# EAGLE board BulkBoard3 (EAGLE 9.0.0), part 1 of 3
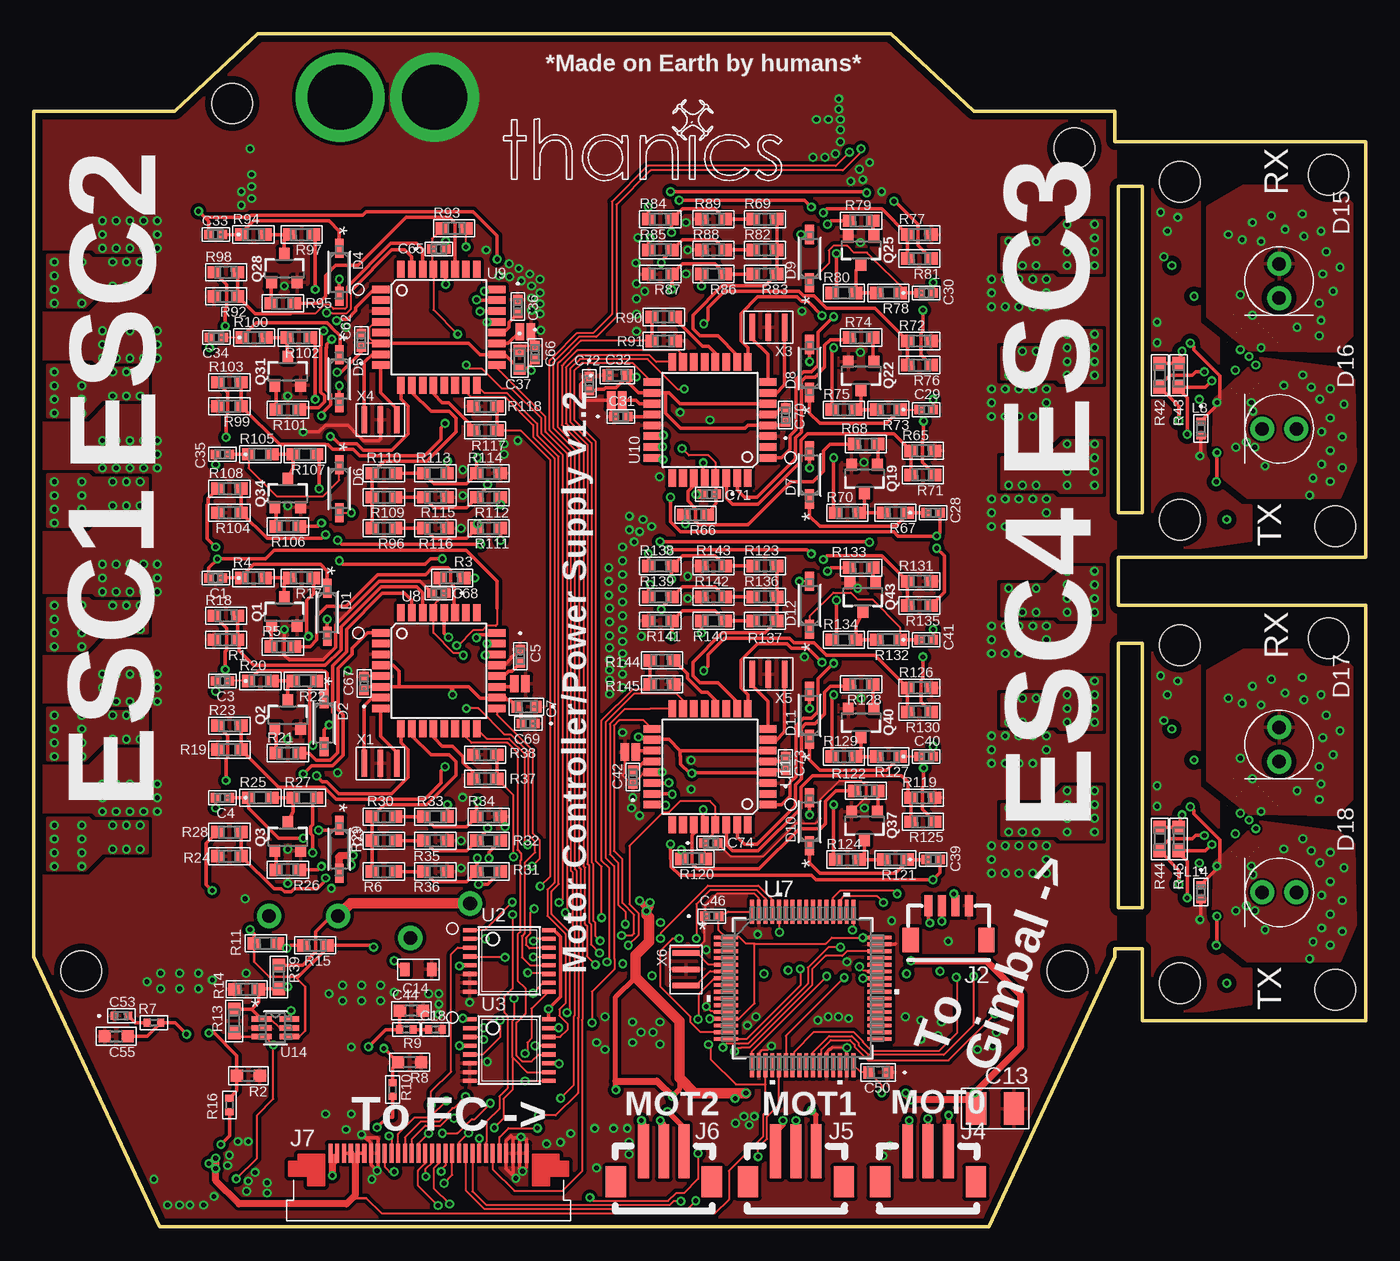
[diagram p0: board, top side]
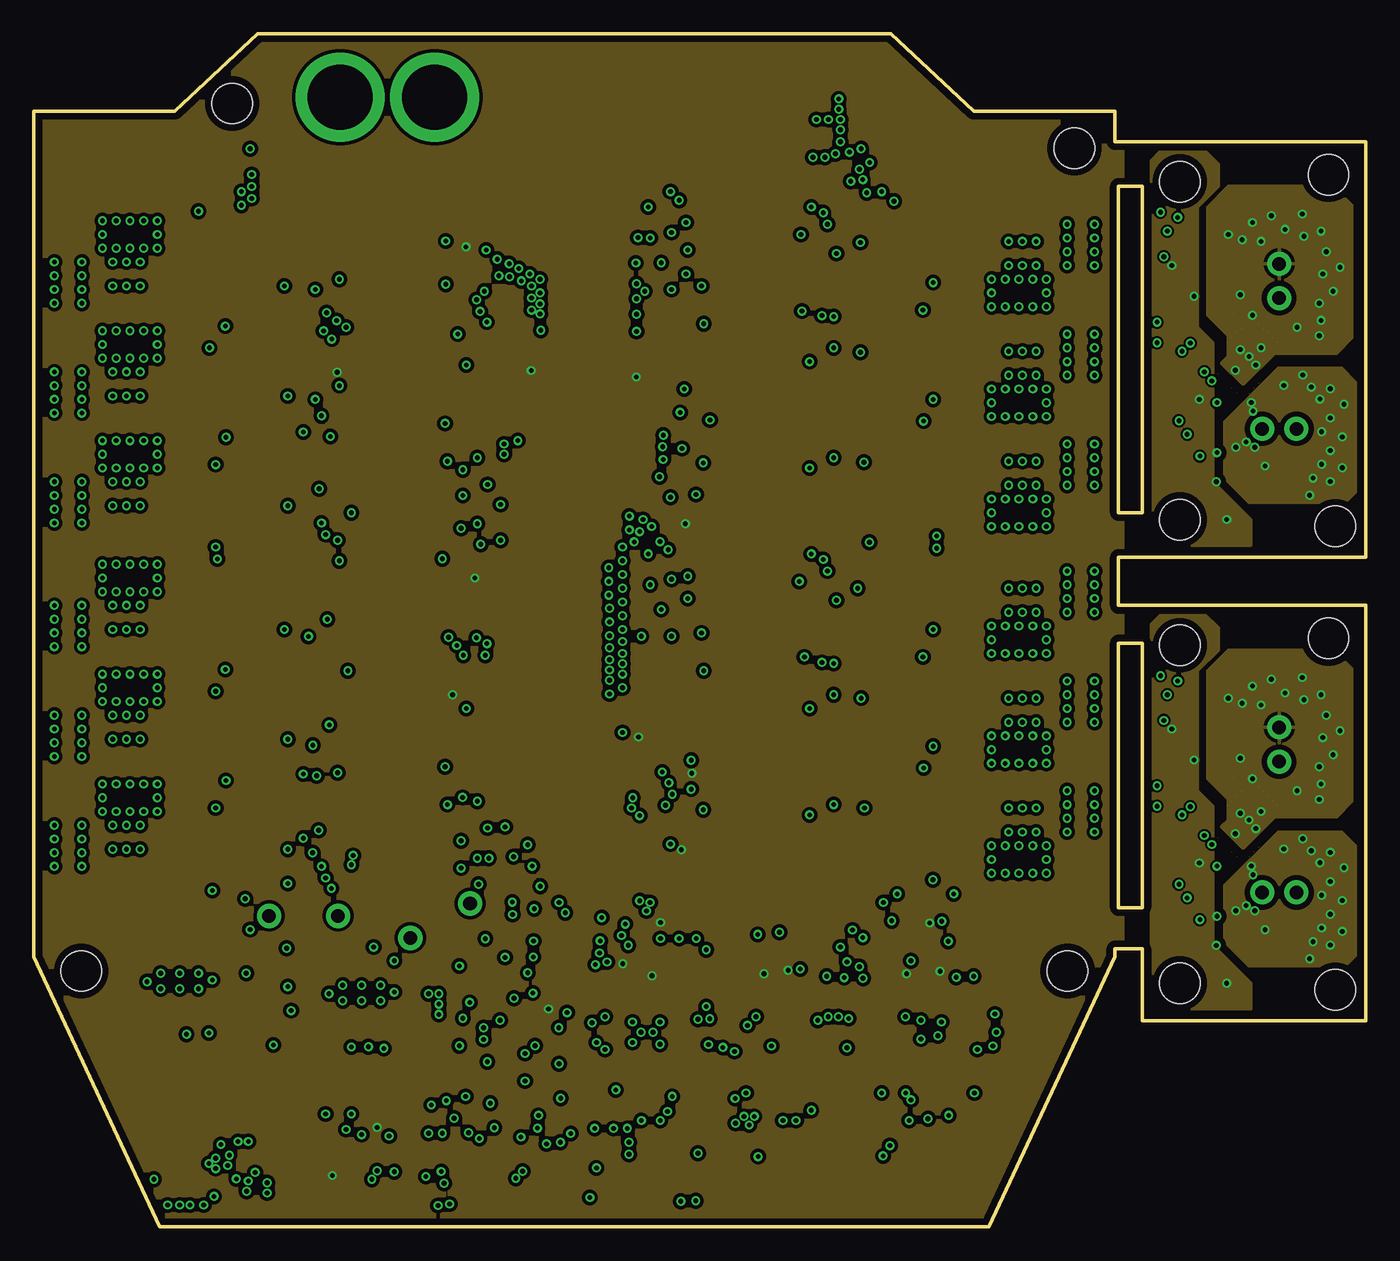
[diagram p1: board, inner layer Route2]
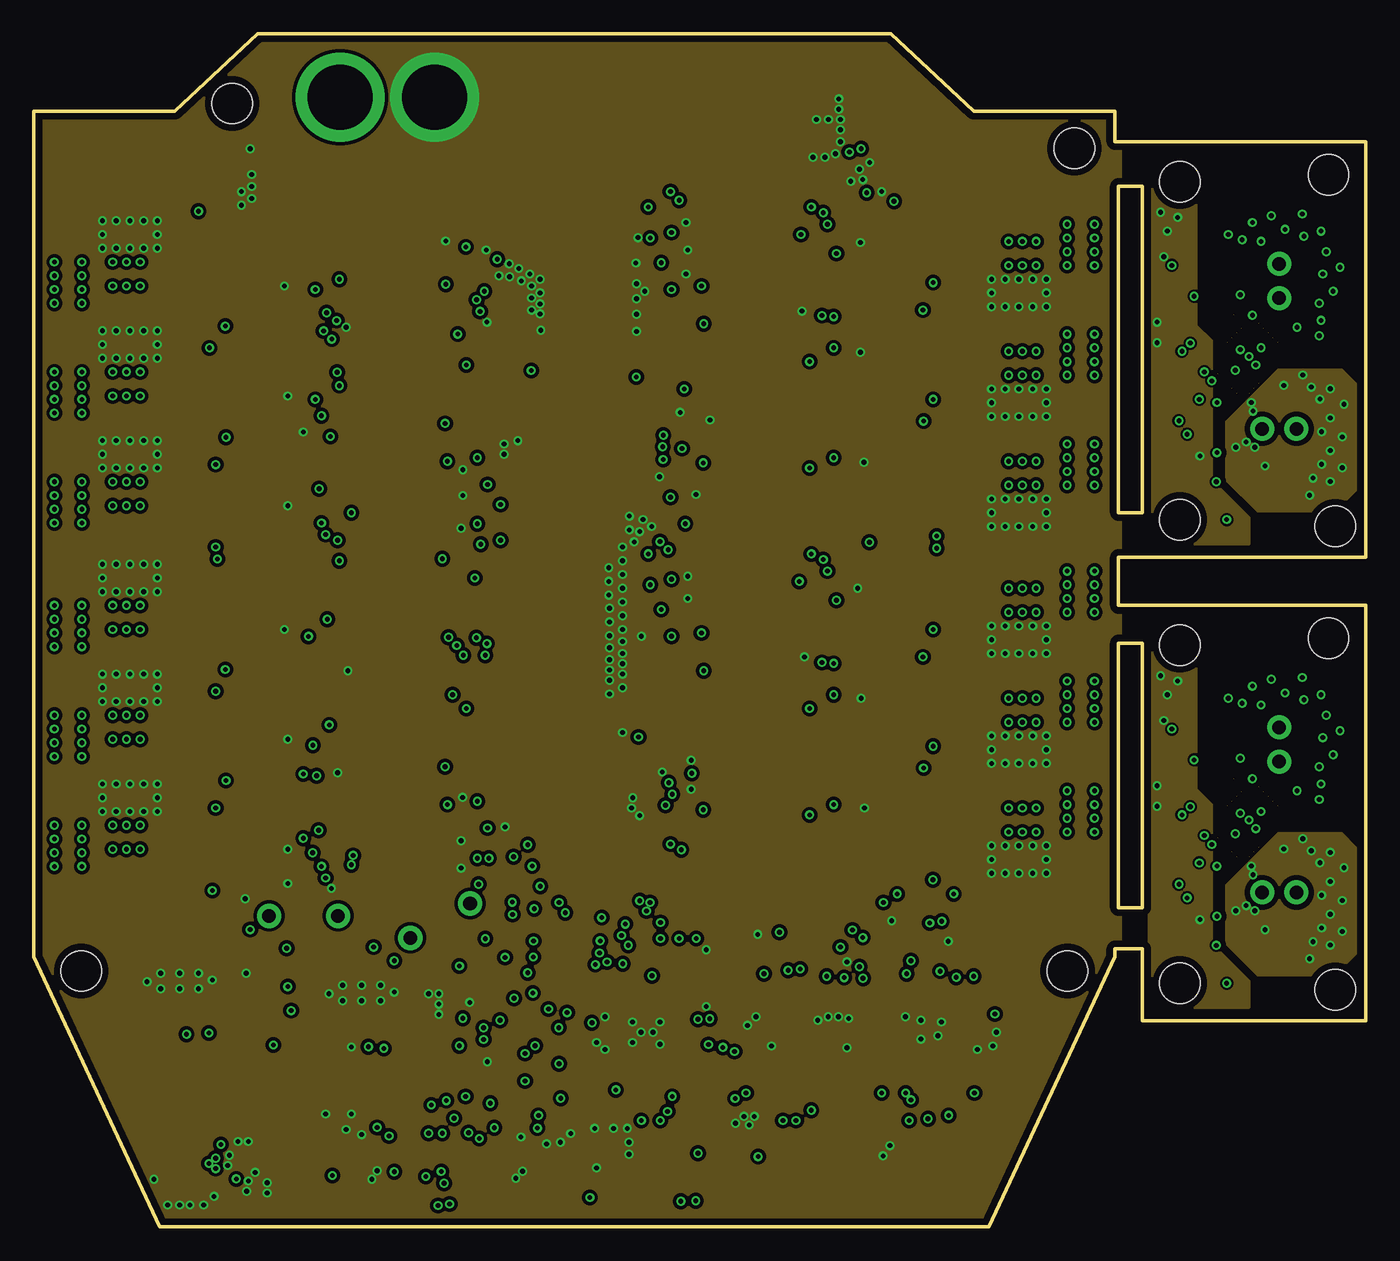
[diagram p2: board, inner layer Route15]
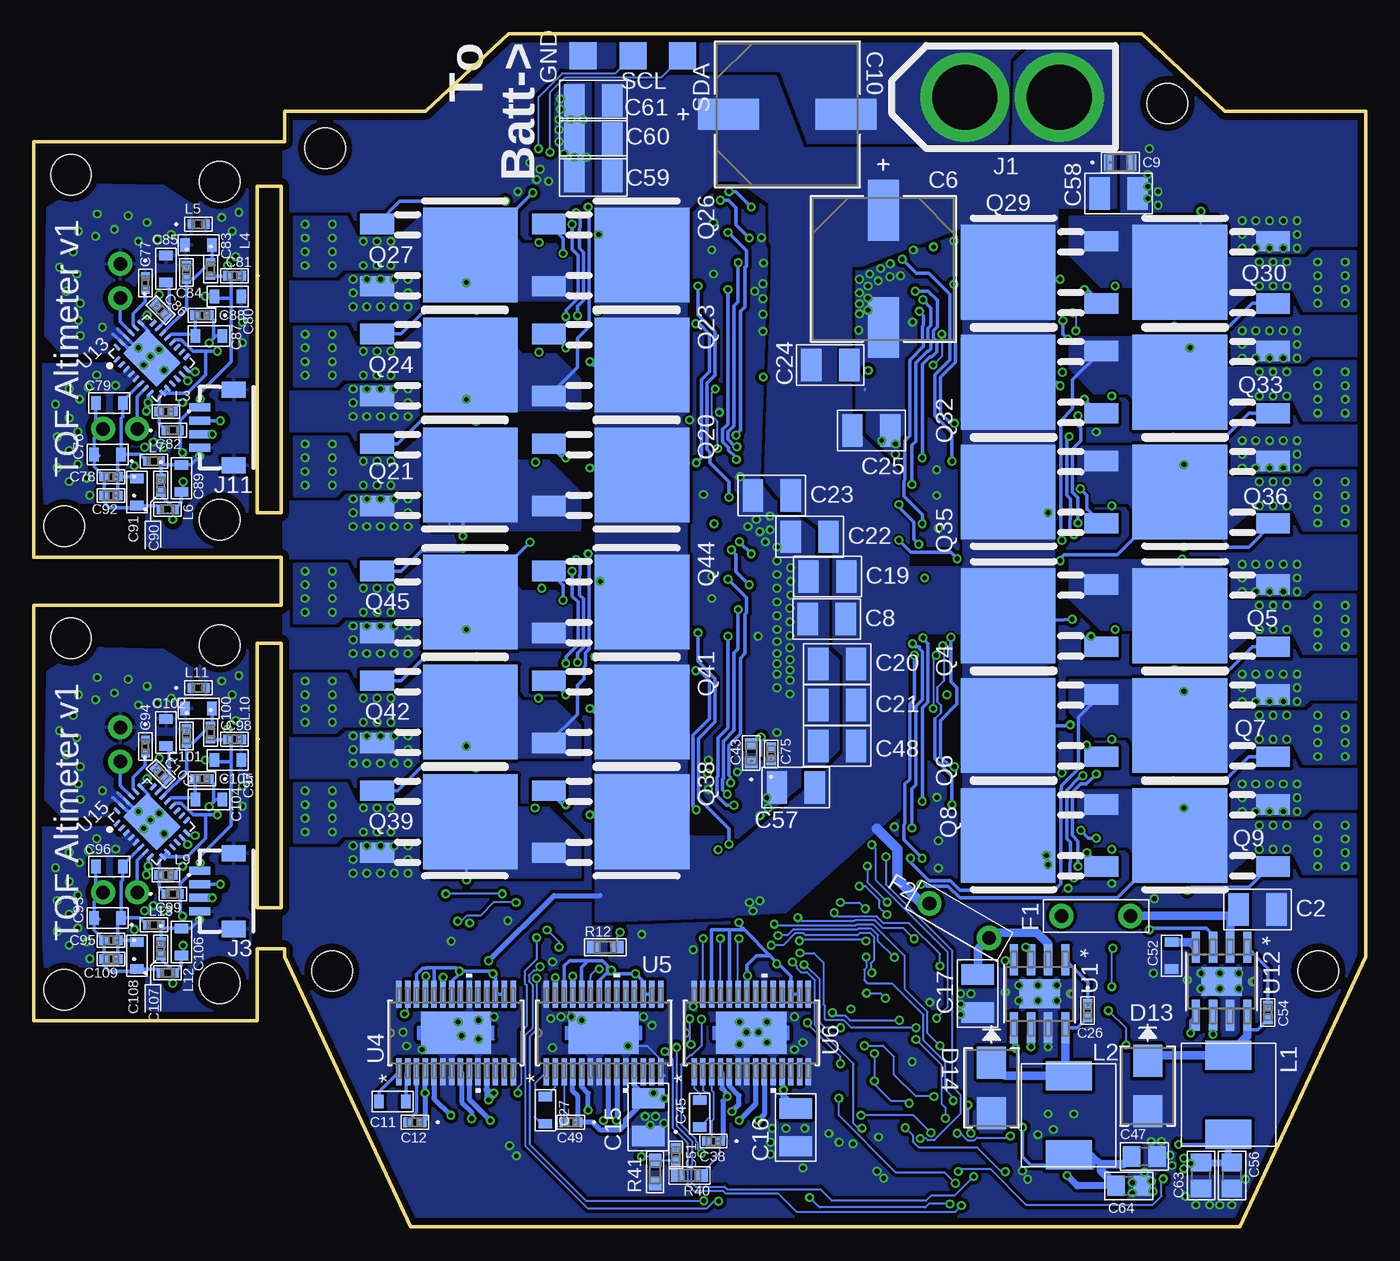
[diagram p3: board, bottom side, seen from below]

Size 98.55 x 88.25 mm. Coordinates in mm from the lower left corner, seen from the top.
Outline: 0,20 9.33,0 70.67,0 80,20 80,20.56 82.04,20.56 82.04,15.24 98.55,15.24 98.55,45.97 80.26,45.97 80.26,49.53 98.55,49.53 98.55,80.26 80,80.27 80,82.54 69.56,82.54 63.43,88.25 16.57,88.25 10.44,82.54 0,82.54 0,20
Outline: 80.26,43.18 82.04,43.18 82.04,23.62 80.26,23.62 80.26,43.18
Outline: 80.26,76.96 82.04,76.96 82.04,52.83 80.26,52.83 80.26,76.96
Copper layers (1*2*15*16): Top 0.035mm / dielectric 0.2mm / Route2 0.035mm / dielectric 1.2mm / Route15 0.035mm / dielectric 0.2mm / Bottom 0.035mm
Design rules "Elecrow_4-layer_PCB_eagle_rule": minimum track width 6mil, minimum drill 12mil, track to track 6mil, track to pad 6mil, pad to pad 6mil, via to via 8mil, smd to smd 0mil, copper to edge 20mil, drill to drill 10mil, minimum pad ring 6mil, minimum via ring 6mil, stop-mask expansion 0mil, vias tented up to drill 100mil, thermal gap 10mil
Holes 3 mm at 77,79.79 14.68,83.1 76.49,18.94 3.51,18.94 84.8,52.32 84.8,77.32 95.8,77.82 96.3,51.82 84.8,18.03 84.8,43.03 95.8,43.53 96.3,17.53

## Footprints (pad centres in the part's own frame; a part is rotated, then mirrored left to right if it is on the bottom)
0402-M = smd 0.711 x 0.711: 1 -0.508,0; 2 0.508,0
1210_CAPACITOR = smd 1.5 x 2.4: 1 -1.4,0; 2 1.4,0
PCAP_10X10-ELECT-M = smd 4.496 x 2.311: 1 -4.343,0; 2 4.343,0
G-188-M = smd 0.813 x 0.914: 1 -0.699,0; 2 0.699,0
G-21 = smd 0.711 x 1.245: 1 -0.851,0; 2 0.851,0
0603_CAPACITOR = smd 0.701 x 1.001: 1 -1.001,0; 2 1.001,0
C0402 = smd 0.5 x 0.6: 1 -0.5,0; 2 0.5,0
C0603 = smd 0.9 x 0.9: 1 -0.85,0; 2 0.85,0
C0805 = smd 1.3 x 1.5: 1 -0.95,0; 2 0.95,0
0402_CAPACITOR = smd 0.559 x 0.61: 1 -0.521,0; 2 0.521,0
SOD123-M = smd 1.416 x 0.652: A 1.776,0; C -1.776,0
DIODE_DO214AA_MBRS-M = smd 2.362 x 2.159: 1 -1.867,0; 2 1.867,0
5MM_LED = drill 1 pad 1.778: A 1.27,0; C -1.27,0
0ZRB0400FF1A = drill 1 pad 1.8: 1 -2.55,0; 2 2.55,0
TP20SQ = smd 2 x 2: TP 0,0
XT60_CONNECTOR = drill 4.826 pad 6.604: + 3.5,0; - -3.5,0
JST_SH_4POS = smd 0.6 x 1.55: 1 -1.5,0; 2 -0.5,0; 3 0.5,0; 4 1.5,0 | smd 1.2 x 1.8: P$5 -2.8,2.525; P$6 2.8,2.525
B3B-ZR-SM4 = smd 0.8 x 4: 1 -1.5,0; 2 0,0; 3 1.5,0 | smd 1.5 x 2.3: P$4 3.55,2.25; P$5 -3.55,2.25
SFV30R-1STE1HLF = smd 0.3 x 1.4: 1 -7.25,0; 2 -6.75,0; 3 -6.25,0; 4 -5.75,0; 5 -5.25,0; 6 -4.75,0; 7 -4.25,0; 8 -3.75,0; 9 -3.25,0; 10 -2.75,0; 11 -2.25,0; 12 -1.75,0; 13 -1.25,0; 14 -0.75,0; 15 -0.25,0; 16 0.25,0; 17 0.75,0; 18 1.25,0; 19 1.75,0; 20 2.25,0; 21 2.75,0; 22 3.25,0; 23 3.75,0; 24 4.25,0; 25 4.75,0; 26 5.25,0; 27 5.75,0; 28 6.25,0; 29 6.75,0; 30 7.25,0
SMT-JUMPER_2_NO_NO-SILK = smd 0.635 x 1.27: 1 -0.406,0; 2 0.406,0
PA431.XXX = smd 2.15 x 3.4: P$1 -2.925,0; P$2 2.925,0
IND_1005-M = smd 0.525 x 0.702: 1 -0.542,0; 2 0.542,0
SOT23-3 = smd 0.8 x 0.9: 1 -0.95,-1; 2 0.95,-1; 3 0,1.1
DPAK = smd 1.5 x 2.5: 1 -2.3,0; 3 2.3,0 | smd 7 x 7: 2 0,6.9
RC0603N-M = smd 0.965 x 0.914: 1 -0.876,0; 2 0.876,0
R0603 = smd 0.9 x 0.9: 1 -0.85,0; 2 0.85,0
R0402 = smd 0.5 x 0.6: 1 -0.5,0; 2 0.5,0
D8-M = smd 2.286 x 0.61: 1 -2.515,1.905; 2 -2.515,0.635; 3 -2.515,-0.635; 4 -2.515,-1.905; 5 2.515,-1.905; 6 2.515,-0.635; 7 2.515,0.635; 8 2.515,1.905 | smd 2.13 x 3: EP 0,0
TSSOP16 = smd 0.305 x 0.991: 1 -2.275,-2.918; 2 -1.625,-2.918; 3 -0.975,-2.918; 4 -0.325,-2.918; 5 0.325,-2.918; 6 0.975,-2.918; 7 1.625,-2.918; 8 2.275,-2.918; 9 2.275,2.918; 10 1.625,2.918; 11 0.975,2.918; 12 0.325,2.918; 13 -0.325,2.918; 14 -0.975,2.918; 15 -1.625,2.918; 16 -2.275,2.918
PWP28_5P18X3P1-M = smd 1.981 x 0.406: 1 -2.87,4.225; 2 -2.87,3.575; 3 -2.87,2.925; 4 -2.87,2.275; 5 -2.87,1.625; 6 -2.87,0.975; 7 -2.87,0.325; 8 -2.87,-0.325; 9 -2.87,-0.975; 10 -2.87,-1.625; 11 -2.87,-2.275; 12 -2.87,-2.925; 13 -2.87,-3.575; 14 -2.87,-4.225; 15 2.87,-4.225; 16 2.87,-3.575; 17 2.87,-2.925; 18 2.87,-2.275; 19 2.87,-1.625; 20 2.87,-0.975; 21 2.87,-0.325; 22 2.87,0.325; 23 2.87,0.975; 24 2.87,1.625; 25 2.87,2.275; 26 2.87,2.925; 27 2.87,3.575; 28 2.87,4.225 | smd 3.1 x 5.18: 29 0,0
LQFP-64-M = smd 1.778 x 0.279: 1 -5.677,3.75; 2 -5.677,3.25; 3 -5.677,2.75; 4 -5.677,2.25; 5 -5.677,1.75; 6 -5.677,1.25; 7 -5.677,0.75; 8 -5.677,0.25; 9 -5.677,-0.25; 10 -5.677,-0.75; 11 -5.677,-1.25; 12 -5.677,-1.75; 13 -5.677,-2.25; 14 -5.677,-2.75; 15 -5.677,-3.25; 16 -5.677,-3.75; 33 5.677,-3.75; 34 5.677,-3.25; 35 5.677,-2.75; 36 5.677,-2.25; 37 5.677,-1.75; 38 5.677,-1.25; 39 5.677,-0.75; 40 5.677,-0.25; 41 5.677,0.25; 42 5.677,0.75; 43 5.677,1.25; 44 5.677,1.75; 45 5.677,2.25; 46 5.677,2.75; 47 5.677,3.25; 48 5.677,3.75 | smd 0.279 x 1.778: 17 -3.75,-5.677; 18 -3.25,-5.677; 19 -2.75,-5.677; 20 -2.25,-5.677; 21 -1.75,-5.677; 22 -1.25,-5.677; 23 -0.75,-5.677; 24 -0.25,-5.677; 25 0.25,-5.677; 26 0.75,-5.677; 27 1.25,-5.677; 28 1.75,-5.677; 29 2.25,-5.677; 30 2.75,-5.677; 31 3.25,-5.677; 32 3.75,-5.677; 49 3.75,5.677; 50 3.25,5.677; 51 2.75,5.677; 52 2.25,5.677; 53 1.75,5.677; 54 1.25,5.677; 55 0.75,5.677; 56 0.25,5.677; 57 -0.25,5.677; 58 -0.75,5.677; 59 -1.25,5.677; 60 -1.75,5.677; 61 -2.25,5.677; 62 -2.75,5.677; 63 -3.25,5.677; 64 -3.75,5.677
TQFP32-08 = smd 1.27 x 0.559: 1 -4.293,2.8; 2 -4.293,2; 3 -4.293,1.2; 4 -4.293,0.4; 5 -4.293,-0.4; 6 -4.293,-1.2; 7 -4.293,-2; 8 -4.293,-2.8; 17 4.293,-2.8; 18 4.293,-2; 19 4.293,-1.2; 20 4.293,-0.4; 21 4.293,0.4; 22 4.293,1.2; 23 4.293,2; 24 4.293,2.8 | smd 0.559 x 1.27: 9 -2.8,-4.293; 10 -2,-4.293; 11 -1.2,-4.293; 12 -0.4,-4.293; 13 0.4,-4.293; 14 1.2,-4.293; 15 2,-4.293; 16 2.8,-4.293; 25 2.8,4.293; 26 2,4.293; 27 1.2,4.293; 28 0.4,4.293; 29 -0.4,4.293; 30 -1.2,4.293; 31 -2,4.293; 32 -2.8,4.293
28-VQFN = smd 0.6 x 0.24: 1 -1.9,1.75; 2 -1.9,1.25; 3 -1.9,0.75; 4 -1.9,0.25; 5 -1.9,-0.25; 6 -1.9,-0.75; 7 -1.9,-1.25; 8 -1.9,-1.75; 15 1.9,-1.75; 16 1.9,-1.25; 17 1.9,-0.75; 18 1.9,-0.25; 19 1.9,0.25; 20 1.9,0.75; 21 1.9,1.25; 22 1.9,1.75 | smd 0.24 x 0.6: 9 -1.25,-2.4; 10 -0.75,-2.4; 11 -0.25,-2.4; 12 0.25,-2.4; 13 0.75,-2.4; 14 1.25,-2.4; 23 1.25,2.4; 24 0.75,2.4; 25 0.25,2.4; 26 -0.25,2.4; 27 -0.75,2.4; 28 -1.25,2.4 | smd 2.55 x 3.55: 29 0,0
DCK6-M = smd 1.473 x 0.406: 1 -1.029,0.65; 2 -1.029,0; 3 -1.029,-0.65; 4 1.029,-0.65; 5 1.029,0; 6 1.029,0.65
3-SMD = smd 0.4 x 2: 1 1.2,0; 2 0,0; 3 -1.2,0

## Placement (x,y rotation side)
C1  0.1uF (50V)  [0402-M]  13.46,48.01 180 top
C2  22uF  [1210_CAPACITOR]  8,23.5 0 bottom
C3  0.1uF (50V)  [0402-M]  13.97,40.39 180 top
C4  0.1uF (50V)  [0402-M]  13.97,31.75 180 top
C5  0.1uF  [0402-M]  35.99,42.21 270 top
C6  470uF  [PCAP_10X10-ELECT-M]  35.69,70.87 270 bottom
C7  2.2uF  [G-188-M]  36.45,38.48 180 top
C8  22uF  [1210_CAPACITOR]  39.88,44.96 0 bottom
C9  10uF  [G-21]  18.16,78.74 0 bottom
C10  470uF  [PCAP_10X10-ELECT-M]  42.8,82.3 0 bottom
C11  10nF  [0603_CAPACITOR]  72.01,9.27 180 bottom
C12  0.1uF  [0402-M]  70.36,7.75 180 bottom
C13  22uF  [1210_CAPACITOR]  71.12,8.76 180 top
C14  10nF  [0603_CAPACITOR]  28.45,19.05 180 top
C15  22uF  [1210_CAPACITOR]  53.09,8.13 90 bottom
C16  22uF  [1210_CAPACITOR]  42.16,7.37 90 bottom
C17  22uF  [1210_CAPACITOR]  28.7,17.27 270 bottom
C18  1nF  [C0402]  29.72,14.61 0 top
C19  22uF  [1210_CAPACITOR]  39.83,48.11 0 bottom
C20  22uF  [1210_CAPACITOR]  39.12,41.66 0 bottom
C21  22uF  [1210_CAPACITOR]  39.12,38.61 0 bottom
C22  22uF  [1210_CAPACITOR]  41.15,51.05 0 bottom
C23  22uF  [1210_CAPACITOR]  43.94,54.1 0 bottom
C24  22uF  [1210_CAPACITOR]  39.62,63.75 180 bottom
C25  22uF  [1210_CAPACITOR]  36.58,58.93 180 bottom
C26  0.1uF  [0402-M]  20.57,16 270 bottom
C27  10nF  [0603_CAPACITOR]  60.71,8.64 270 bottom
C28  0.1uF (50V)  [0402-M]  66.55,52.83 0 top
C29  0.1uF (50V)  [0402-M]  66.04,60.45 0 top
C30  0.1uF (50V)  [0402-M]  66.04,69.09 0 top
C31  0.1uF  [0402-M]  43.43,59.94 0 top
C32  2.2uF  [G-188-M]  43.18,62.99 0 top
C33  0.1uF (50V)  [0402-M]  13.46,73.41 180 top
C34  0.1uF (50V)  [0402-M]  13.51,65.79 180 top
C35  0.1uF (50V)  [0402-M]  13.97,57.15 180 top
C36  0.1uF  [0402-M]  35.81,68.07 270 top
C37  2.2uF  [G-188-M]  35.94,64.13 270 top
C38  0.1uF  [0402-M]  48.26,6.35 180 bottom
C39  0.1uF (50V)  [0402-M]  66.55,27.18 0 top
C40  0.1uF (50V)  [0402-M]  66.04,34.8 0 top
C41  0.1uF (50V)  [0402-M]  66.04,43.43 0 top
C42  0.1uF  [0402-M]  44.32,33.27 90 top
C43  2.2uF  [G-188-M]  45.47,35.05 90 bottom
C44  43pF  [C0603]  27.94,16 0 top
C45  10nF  [0603_CAPACITOR]  49.28,8.38 90 bottom
C46  0.1uF  [0402-M]  50.16,22.99 0 top
C47  22uF  [C0805]  16.38,5.21 0 bottom
C48  22uF  [1210_CAPACITOR]  39.12,35.56 180 bottom
C49  0.1uF  [0402-M]  58.8,7.75 180 bottom
C50  2.2uF  [G-188-M]  62.48,11.43 180 top
C51  0.1uF  [0402-M]  51.05,5.33 270 bottom
C52  10nF  [0603_CAPACITOR]  14.35,20.07 90 bottom
C53  2.2nF  [0402_CAPACITOR]  6.48,15.62 0 top
C54  0.1uF  [0402-M]  7.24,15.88 270 bottom
C55  43pF  [C0603]  6.1,14.1 180 top
C56  22uF  [C0805]  9.91,3.81 270 bottom
C57  22uF  [1210_CAPACITOR]  42.16,32.51 180 bottom
C58  22uF  [1210_CAPACITOR]  18.29,76.45 0 bottom
C59  22uF  [1210_CAPACITOR]  57.15,77.72 180 bottom
C60  22uF  [1210_CAPACITOR]  57.15,80.52 180 bottom
C61  22uF  [1210_CAPACITOR]  57.15,83.31 180 bottom
C62  0.1uF  [0402-M]  24.23,65.58 90 top
C63  22uF  [C0805]  12.19,3.81 270 bottom
C64  22uF  [C0805]  17.53,3.05 0 bottom
C65  0.1uF  [0402-M]  29.97,72.34 0 top
C66  0.1uF  [0402-M]  37.08,64.67 270 top
C67  0.1uF  [0402-M]  24.43,40.21 90 top
C68  0.1uF  [0402-M]  29.97,46.89 180 top
C69  0.1uF  [0402-M]  36.58,37.24 180 top
C70  0.1uF  [0402-M]  55.63,60.05 90 top
C71  0.1uF  [0402-M]  49.99,54.2 180 top
C72  0.1uF  [0402-M]  41.1,62.38 270 top
C73  0.1uF  [0402-M]  55.63,34.29 90 top
C74  0.1uF  [0402-M]  50.09,28.4 0 top
C75  0.1uF  [0402-M]  43.99,35 90 bottom
C76  1uF  [0603_CAPACITOR]  93.09,57.15 180 bottom
C77  6pF  [0402_CAPACITOR]  90.3,69.82 270 bottom
C78  0.1uF  [0402-M]  92.84,55.5 180 bottom
C79  1uF  [0603_CAPACITOR]  92.96,60.96 180 bottom
C80  1uF  [0603_CAPACITOR]  84.2,68.83 0 bottom
C81  0.1uF  [0402-M]  83.69,70.36 180 bottom
C82  0.1uF  [0402-M]  88.77,60.33 180 bottom
C83  1uF  [0603_CAPACITOR]  86.36,72.64 180 bottom
C84  0.1uF  [0402-M]  87.25,70.61 270 bottom
C85  1uF  [0603_CAPACITOR]  88.77,70.87 90 bottom
C86  0.1uF  [0402-M]  89.15,67.82 315 bottom
C87  1uF  [0603_CAPACITOR]  85.6,65.91 0 bottom
C88  0.1uF  [0402-M]  86.11,67.44 180 bottom
C89  1uF  [0603_CAPACITOR]  87.63,55.37 90 bottom
C90  0.1uF  [0402-M]  89.15,54.86 270 bottom
C91  1uF  [0603_CAPACITOR]  90.93,54.36 90 bottom
C92  0.1uF  [0402-M]  92.84,54.1 180 bottom
C93  1uF  [0603_CAPACITOR]  93.09,22.86 180 bottom
C94  6pF  [0402_CAPACITOR]  90.3,35.53 270 bottom
C95  0.1uF  [0402-M]  92.84,21.21 180 bottom
C96  1uF  [0603_CAPACITOR]  92.96,26.67 180 bottom
C97  1uF  [0603_CAPACITOR]  84.2,34.54 0 bottom
C98  0.1uF  [0402-M]  83.69,36.07 180 bottom
C99  0.1uF  [0402-M]  88.77,26.04 180 bottom
C100  1uF  [0603_CAPACITOR]  86.36,38.35 180 bottom
C101  0.1uF  [0402-M]  87.25,36.32 270 bottom
C102  1uF  [0603_CAPACITOR]  88.77,36.58 90 bottom
C103  0.1uF  [0402-M]  89.15,33.53 315 bottom
C104  1uF  [0603_CAPACITOR]  85.6,31.62 0 bottom
C105  0.1uF  [0402-M]  86.11,33.15 180 bottom
C106  1uF  [0603_CAPACITOR]  87.63,21.08 90 bottom
C107  0.1uF  [0402-M]  89.15,20.57 270 bottom
C108  1uF  [0603_CAPACITOR]  90.93,20.07 90 bottom
C109  0.1uF  [0402-M]  92.84,19.81 180 bottom
D1  1N4148  [SOD123-M]  21.72,45.47 270 top
D2  1N4148  [SOD123-M]  21.49,37.29 270 top
D3  1N4148  [SOD123-M]  22.61,27.94 270 top
D4  1N4148  [SOD123-M]  22.61,70.61 270 top
D5  1N4148  [SOD123-M]  22.61,62.74 270 top
D6  1N4148  [SOD123-M]  22.61,54.61 270 top
D7  1N4148  [SOD123-M]  57.4,55.63 90 top
D8  1N4148  [SOD123-M]  57.4,63.5 90 top
D9  1N4148  [SOD123-M]  57.4,71.63 90 top
D10  1N4148  [SOD123-M]  57.4,29.97 90 top
D11  1N4148  [SOD123-M]  57.4,37.85 90 top
D12  1N4148  [SOD123-M]  57.4,45.97 90 top
D13  SSB44-E3/52T  [DIODE_DO214AA_MBRS-M]  16.13,10.41 270 bottom
D14  SSB44-E3/52T  [DIODE_DO214AA_MBRS-M]  27.69,10.29 270 bottom
D15  SFH203FA  [5MM_LED]  92.15,69.97 90 top
D16  SFH4550  [5MM_LED]  92.16,59.04 0 top
D17  SFH203FA  [5MM_LED]  92.15,35.68 90 top
D18  SFH4550  [5MM_LED]  92.16,24.75 0 top
F1  0ZRB0400FF1A  [0ZRB0400FF1A]  19.96,23.01 0 bottom
F2  0ZRB0400FF1A  [0ZRB0400FF1A]  30.07,22.66 330 bottom
GND  TPTP20SQ  [TP20SQ]  57.91,86.61 180 bottom
J1  ESC_CONTACTS  [XT60_CONNECTOR]  26.16,83.57 0 bottom
J2  [JST_SH_4POS]  67.69,23.75 180 top
J3  [JST_SH_4POS]  86.29,24.84 270 bottom
J4  B3B-ZR-SM4  [B3B-ZR-SM4]  66.17,5.59 180 top
J5  B3B-ZR-SM4  [B3B-ZR-SM4]  56.39,5.59 180 top
J6  B3B-ZR-SM4  [B3B-ZR-SM4]  46.61,5.59 180 top
J7  SFV30R-1STE1HLF  [SFV30R-1STE1HLF]  29.21,5.46 0 top
J11  [JST_SH_4POS]  86.29,59.13 270 bottom
JP1  JUMPER-SMT_2_NO_NO-SILK  [SMT-JUMPER_2_NO_NO-SILK]  35.97,40.18 0 top
JP3  JUMPER-SMT_2_NO_NO-SILK  [SMT-JUMPER_2_NO_NO-SILK]  43.13,61.16 180 top
JP4  JUMPER-SMT_2_NO_NO-SILK  [SMT-JUMPER_2_NO_NO-SILK]  36.37,66.22 0 top
JP5  JUMPER-SMT_2_NO_NO-SILK  [SMT-JUMPER_2_NO_NO-SILK]  44.15,35.13 180 top
L1  10uH  [PA431.XXX]  10.16,9.78 270 bottom
L2  10uH  [PA431.XXX]  21.97,8.26 270 bottom
L3  MMZ1005S182ET000IND_1005-M  [IND_1005-M]  88.27,58.93 0 bottom
L4  MMZ1005S182ET000IND_1005-M  [IND_1005-M]  85.47,70.87 270 bottom
L5  MMZ1005S182ET000IND_1005-M  [IND_1005-M]  86.36,74.17 0 bottom
L6  MMZ1005S182ET000IND_1005-M  [IND_1005-M]  88.65,53.09 0 bottom
L7  MMZ1005S182ET000IND_1005-M  [IND_1005-M]  89.66,56.64 0 bottom
L8  MMZ1005S182ET000IND_1005-M  [IND_1005-M]  86.36,59.05 270 top
L9  MMZ1005S182ET000IND_1005-M  [IND_1005-M]  88.27,24.64 0 bottom
L10  MMZ1005S182ET000IND_1005-M  [IND_1005-M]  85.47,36.58 270 bottom
L11  MMZ1005S182ET000IND_1005-M  [IND_1005-M]  86.36,39.88 0 bottom
L12  MMZ1005S182ET000IND_1005-M  [IND_1005-M]  88.65,18.8 0 bottom
L13  MMZ1005S182ET000IND_1005-M  [IND_1005-M]  89.66,22.35 0 bottom
L14  MMZ1005S182ET000IND_1005-M  [IND_1005-M]  86.36,24.77 270 top
Q1  500mA/300V  [SOT23-3]  18.54,45.47 0 top
Q2  500mA/300V  [SOT23-3]  18.8,37.85 0 top
Q3  500mA/300V  [SOT23-3]  18.8,28.83 0 top
Q4  IRLR8726  [DPAK]  19.56,45.21 90 bottom
Q5  IRLR8726  [DPAK]  6.86,45.21 90 bottom
Q6  IRLR8726  [DPAK]  19.56,37.08 90 bottom
Q7  IRLR8726  [DPAK]  6.86,37.08 90 bottom
Q8  IRLR8726  [DPAK]  19.56,28.96 90 bottom
Q9  IRLR8726  [DPAK]  6.86,28.96 90 bottom
Q19  500mA/300V  [SOT23-3]  61.47,55.37 180 top
Q20  IRLR8726  [DPAK]  60.45,55.63 270 bottom
Q21  IRLR8726  [DPAK]  73.15,55.63 270 bottom
Q22  500mA/300V  [SOT23-3]  61.21,62.99 180 top
Q23  IRLR8726  [DPAK]  60.45,63.75 270 bottom
Q24  IRLR8726  [DPAK]  73.15,63.75 270 bottom
Q25  500mA/300V  [SOT23-3]  61.21,72.26 180 top
Q26  IRLR8726  [DPAK]  60.45,71.88 270 bottom
Q27  IRLR8726  [DPAK]  73.15,71.88 270 bottom
Q28  500mA/300V  [SOT23-3]  18.54,70.87 0 top
Q29  IRLR8726  [DPAK]  19.56,70.61 90 bottom
Q30  IRLR8726  [DPAK]  6.86,70.61 90 bottom
Q31  500mA/300V  [SOT23-3]  18.8,63.25 0 top
Q32  IRLR8726  [DPAK]  19.56,62.48 90 bottom
Q33  IRLR8726  [DPAK]  6.86,62.48 90 bottom
Q34  500mA/300V  [SOT23-3]  18.8,54.23 0 top
Q35  IRLR8726  [DPAK]  19.56,54.36 90 bottom
Q36  IRLR8726  [DPAK]  6.86,54.36 90 bottom
Q37  500mA/300V  [SOT23-3]  61.47,29.72 180 top
Q38  IRLR8726  [DPAK]  60.45,29.97 270 bottom
Q39  IRLR8726  [DPAK]  73.15,29.97 270 bottom
Q40  500mA/300V  [SOT23-3]  61.21,37.34 180 top
Q41  IRLR8726  [DPAK]  60.45,38.1 270 bottom
Q42  IRLR8726  [DPAK]  73.15,38.1 270 bottom
Q43  500mA/300V  [SOT23-3]  61.34,46.61 180 top
Q44  IRLR8726  [DPAK]  60.45,46.23 270 bottom
Q45  IRLR8726  [DPAK]  73.15,46.23 270 bottom
R1  10k  [RC0603N-M]  14.22,43.43 180 top
R2  3.24k  [R0603]  15.88,11.18 180 top
R3  10k  [RC0603N-M]  30.95,48.01 0 top
R4  2.2k  [RC0603N-M]  16.26,48.01 0 top
R5  4.7k  [RC0603N-M]  18.43,42.93 0 top
R6  47k  [RC0603N-M]  25.91,26.29 180 top
R7  28.7k  [R0402]  8.89,15.11 0 top
R8  1.96k  [R0603]  27.81,12.19 180 top
R9  39.2k  [R0402]  27.56,14.61 180 top
R10  10.2k  [R0402]  26.54,10.16 270 top
R11  100k  [RC0603N-M]  17.17,20.98 180 top
R12  10k  [RC0603N-M]  56.26,20.7 0 bottom
R13  100k  [RC0603N-M]  14.83,15.24 270 top
R14  1k  [RC0603N-M]  15.75,17.58 180 top
R15  100k  [RC0603N-M]  20.83,20.83 180 top
R16  10.2k  [R0402]  14.48,9.02 270 top
R17  100R  [RC0603N-M]  19.81,48.01 180 top
R18  100R  [RC0603N-M]  14.22,45.21 0 top
R19  10k  [RC0603N-M]  14.48,35.31 180 top
R20  2.2k  [RC0603N-M]  16.76,40.39 0 top
R21  4.7k  [RC0603N-M]  18.8,35.05 0 top
R22  100R  [RC0603N-M]  20.07,40.39 180 top
R23  100R  [RC0603N-M]  14.48,37.08 0 top
R24  10k  [RC0603N-M]  14.48,27.43 180 top
R25  2.2k  [RC0603N-M]  16.76,31.75 0 top
R26  4.7k  [RC0603N-M]  18.8,26.42 0 top
R27  100R  [RC0603N-M]  20.07,31.75 180 top
R28  100R  [RC0603N-M]  14.48,29.21 0 top
R29  47k  [RC0603N-M]  25.91,28.57 180 top
R30  47k  [RC0603N-M]  25.91,30.35 180 top
R31  47k  [RC0603N-M]  33.66,26.29 180 top
R32  47k  [RC0603N-M]  33.66,28.57 180 top
R33  47k  [RC0603N-M]  29.72,30.35 180 top
R34  4.7k  [RC0603N-M]  33.66,30.35 0 top
R35  4.7k  [RC0603N-M]  29.72,28.57 0 top
R36  4.7k  [RC0603N-M]  29.72,26.29 0 top
R37  10k  [RC0603N-M]  33.4,33.15 180 top
R38  10k  [RC0603N-M]  33.4,34.92 180 top
R39  2.2k  [RC0603N-M]  18.14,18.49 270 top
R40  10k  [RC0603N-M]  50.04,3.81 180 bottom
R41  1.5k  [RC0603N-M]  52.58,4.06 270 bottom
R42  1k  [RC0603N-M]  83.31,62.99 270 top
R43  1k  [RC0603N-M]  84.71,62.99 270 top
R44  1k  [RC0603N-M]  83.31,28.7 270 top
R45  1k  [RC0603N-M]  84.71,28.7 270 top
R65  10k  [RC0603N-M]  65.79,57.4 0 top
R66  10k  [RC0603N-M]  48.96,52.68 180 top
R67  2.2k  [RC0603N-M]  63.75,52.83 180 top
R68  4.7k  [RC0603N-M]  61.58,57.91 180 top
R69  47k  [RC0603N-M]  54.1,74.55 0 top
R70  100R  [RC0603N-M]  60.2,52.83 0 top
R71  100R  [RC0603N-M]  65.79,55.63 180 top
R72  10k  [RC0603N-M]  65.53,65.53 0 top
R73  2.2k  [RC0603N-M]  63.25,60.45 180 top
R74  4.7k  [RC0603N-M]  61.21,65.79 180 top
R75  100R  [RC0603N-M]  59.94,60.45 0 top
R76  100R  [RC0603N-M]  65.53,63.75 180 top
R77  10k  [RC0603N-M]  65.53,73.41 0 top
R78  2.2k  [RC0603N-M]  63.25,69.09 180 top
R79  4.7k  [RC0603N-M]  61.21,74.42 180 top
R80  100R  [RC0603N-M]  59.94,69.09 0 top
R81  100R  [RC0603N-M]  65.53,71.63 180 top
R82  47k  [RC0603N-M]  54.1,72.26 0 top
R83  47k  [RC0603N-M]  54.1,70.48 0 top
R84  47k  [RC0603N-M]  46.36,74.55 0 top
R85  47k  [RC0603N-M]  46.36,72.26 0 top
R86  47k  [RC0603N-M]  50.29,70.48 0 top
R87  4.7k  [RC0603N-M]  46.36,70.48 180 top
R88  4.7k  [RC0603N-M]  50.29,72.26 180 top
R89  4.7k  [RC0603N-M]  50.29,74.55 180 top
R90  10k  [RC0603N-M]  46.61,67.31 0 top
R91  10k  [RC0603N-M]  46.61,65.53 0 top
R92  10k  [RC0603N-M]  14.22,68.83 180 top
R93  10k  [RC0603N-M]  31.1,73.86 0 top
R94  2.2k  [RC0603N-M]  16.26,73.41 0 top
R95  4.7k  [RC0603N-M]  18.43,68.33 0 top
R96  47k  [RC0603N-M]  25.91,51.69 180 top
R97  100R  [RC0603N-M]  19.81,73.41 180 top
R98  100R  [RC0603N-M]  14.22,70.61 0 top
R99  10k  [RC0603N-M]  14.48,60.71 180 top
R100  2.2k  [RC0603N-M]  16.31,65.79 0 top
R101  4.7k  [RC0603N-M]  18.8,60.45 0 top
R102  100R  [RC0603N-M]  19.61,65.79 180 top
R103  100R  [RC0603N-M]  14.48,62.48 0 top
R104  10k  [RC0603N-M]  14.48,52.83 180 top
R105  2.2k  [RC0603N-M]  16.76,57.15 0 top
R106  4.7k  [RC0603N-M]  18.8,51.82 0 top
R107  100R  [RC0603N-M]  20.07,57.15 180 top
R108  100R  [RC0603N-M]  14.48,54.61 0 top
R109  47k  [RC0603N-M]  25.91,53.98 180 top
R110  47k  [RC0603N-M]  25.91,55.75 180 top
R111  47k  [RC0603N-M]  33.66,51.69 180 top
R112  47k  [RC0603N-M]  33.66,53.98 180 top
R113  47k  [RC0603N-M]  29.72,55.75 180 top
R114  4.7k  [RC0603N-M]  33.66,55.75 0 top
R115  4.7k  [RC0603N-M]  29.72,53.98 0 top
R116  4.7k  [RC0603N-M]  29.72,51.69 0 top
R117  10k  [RC0603N-M]  33.4,58.93 180 top
R118  10k  [RC0603N-M]  33.4,60.71 180 top
R119  10k  [RC0603N-M]  65.79,31.75 0 top
R120  10k  [RC0603N-M]  48.81,27.23 180 top
R121  2.2k  [RC0603N-M]  63.75,27.18 180 top
R122  4.7k  [RC0603N-M]  61.58,32.26 180 top
R123  47k  [RC0603N-M]  54.1,48.9 0 top
R124  100R  [RC0603N-M]  60.2,27.18 0 top
R125  100R  [RC0603N-M]  65.79,29.97 180 top
R126  10k  [RC0603N-M]  65.53,39.88 0 top
R127  2.2k  [RC0603N-M]  63.25,34.8 180 top
R128  4.7k  [RC0603N-M]  61.21,40.13 180 top
R129  100R  [RC0603N-M]  59.94,34.8 0 top
R130  100R  [RC0603N-M]  65.53,38.1 180 top
R131  10k  [RC0603N-M]  65.53,47.75 0 top
R132  2.2k  [RC0603N-M]  63.25,43.43 180 top
R133  4.7k  [RC0603N-M]  61.21,48.77 180 top
R134  100R  [RC0603N-M]  59.94,43.43 0 top
R135  100R  [RC0603N-M]  65.53,45.97 180 top
R136  47k  [RC0603N-M]  54.1,46.61 0 top
R137  47k  [RC0603N-M]  54.1,44.83 0 top
R138  47k  [RC0603N-M]  46.36,48.9 0 top
R139  47k  [RC0603N-M]  46.36,46.61 0 top
R140  47k  [RC0603N-M]  50.29,44.83 0 top
R141  4.7k  [RC0603N-M]  46.36,44.83 180 top
R142  4.7k  [RC0603N-M]  50.29,46.61 180 top
R143  4.7k  [RC0603N-M]  50.29,48.9 180 top
R144  10k  [RC0603N-M]  46.48,41.91 0 top
R145  10k  [RC0603N-M]  46.48,40.13 0 top
SCL  TPTP20SQ  [TP20SQ]  54.23,86.61 180 bottom
SDA  TPTP20SQ  [TP20SQ]  50.55,86.61 180 bottom
U1  TPS54331DRD8-M  [D8-M]  24.13,17.25 270 bottom
U2  74HC4052PW  [TSSOP16]  35.18,19.68 270 top
U3  74HC4052PW  [TSSOP16]  35.18,13.08 270 top
U4  DRV8313  [PWP28_5P18X3P1-M]  67.31,14.35 90 bottom
U5  DRV8313  [PWP28_5P18X3P1-M]  56.39,14.35 90 bottom
U6  DRV8313  [PWP28_5P18X3P1-M]  45.47,14.35 90 bottom
U7  STM32F103RCT6LQFP-64-M  [LQFP-64-M]  56.9,17.65 0 top
U8  MEGA8-AI  [TQFP32-08]  29.97,41.15 0 top
U9  MEGA8-AI  [TQFP32-08]  29.97,66.55 0 top
U10  MEGA8-AI  [TQFP32-08]  50.04,59.69 180 top
U11  MEGA8-AI  [TQFP32-08]  50.04,34.04 180 top
U12  TPS54331DRD8-M  [D8-M]  10.67,18.16 270 bottom
U13  OPT3101  [28-VQFN]  89.82,64.26 45 bottom
U14  SN74LVC1G373DCKRDCK6-M  [DCK6-M]  17.88,14.73 0 top
U15  OPT3101  [28-VQFN]  89.82,29.97 45 bottom
X1  16MHz  [3-SMD]  25.65,34.29 0 top
X3  16MHz  [3-SMD]  54.36,66.55 180 top
X4  16MHz  [3-SMD]  25.65,59.69 0 top
X5  16MHz  [3-SMD]  54.36,40.89 180 top
X6  8MHz  [3-SMD]  48.26,19.05 270 top

## Library data of the parts
C1 C3-C5 C12 C26 C28-C31 C33-C36 C38-C42 C46 C49 C51 C54 C62 C65-C75 C78 C81 C82 C84 C86 C88 C90 C92 C95 C98 C99 C101 C103 C105 C107 C109 = 0.1uF-capacitor-0402; MANUFACTURER_PART_NUMBER: 0402ZD104KAT2A; VENDOR: AVX Corporation
C2 C8 C11 C13-C17 C19-C25 C27 C45 C48 C52 C53 C57-C61 C76 C77 C79 C80 C83 C85 C87 C89 C91 C93 C94 C96 C97 C100 C102 C104 C106 C108 D15-D18 J1-J3 J11 L1 L2 Q4-Q9 Q20 Q21 Q23 Q24 Q26 Q27 Q29 Q30 Q32 Q33 Q35 Q36 Q38 Q39 Q41 Q42 Q44 Q45 U2 U3 U13 U15 X1 X3-X6 = thanics_robotics
C6 C10 = 470uF-capacitor; MANUFACTURER_PART_NUMBER: UWT1E471MNL1GS; VENDOR: Nichicon
C7 C32 C37 C43 C50 = 2.2uF X5R Capacitor; COPYRIGHT: Copyright C 2015 Accelerated Designs. All rights reserved; MANUFACTURER_PART_NUMBER: GRM188R61C225KE15J; VENDOR: Vendor
C9 = 10uF X5R Ceramic Capacitor; COPYRIGHT: Copyright C 2015 Accelerated Designs. All rights reserved; MANUFACTURER_PART_NUMBER: GRM21BR60J106ME19L; VENDOR: Vendor
C18 = thanics-capacitor; RATING: 6.3V
C44 C55 = thanics-capacitor; RATING: 50V
C47 C56 C63 C64 = thanics-capacitor; RATING: 16V
D1-D12 = 1n4148w-diode; COPYRIGHT: Copyright C 2015 Accelerated Designs. All rights reserved; MANUFACTURER_PART_NUMBER: 1N4148W7F; VENDOR: Diodes Inc
D13 D14 = ssb44-schottky; MANUFACTURER_PART_NUMBER: SSB44E352T; VENDOR: Vishay
F1 F2 = ptc-fuse
GND SCL SDA = testpad
J4-J6 = jst
J7 = thanics-connector
JP1 JP3-JP5 = SparkFun-Jumpers
L3-L14 = 1.8k-fb; MANUFACTURER_PART_NUMBER: MMZ1005S182ET000; VENDOR: TDK
Q1-Q3 Q19 Q22 Q25 Q28 Q31 Q34 Q37 Q40 Q43 = SparkFun-DiscreteSemi; PROD_ID: TRANS-09116
R1 R3 R12 R19 R24 R37 R38 R40 R65 R66 R72 R77 R90-R93 R99 R104 R117-R120 R126 R131 R144 R145 = 10k-resistor(0603); MANUFACTURER_PART_NUMBER: RC0603JR0710KL; VENDOR: Yageo
R2 R7-R10 R16 = thanics-resistor
R4 R20 R25 R39 R67 R73 R78 R94 R100 R105 R121 R127 R132 = 2.2k-resistor; MANUFACTURER_PART_NUMBER: RC0603JR072K2L; VENDOR: Yageo
R5 R21 R26 R34-R36 R68 R74 R79 R87-R89 R95 R101 R106 R114-R116 R122 R128 R133 R141-R143 = 4.7k-resistor; MANUFACTURER_PART_NUMBER: RC0603JR074K7L; VENDOR: Yageo
R6 R29-R33 R69 R82-R86 R96 R109-R113 R123 R136-R140 = 47k-resistor; MANUFACTURER_PART_NUMBER: RC0603JR0747KL; VENDOR: Yageo
R11 R13 R15 = 100k-resistor; MANUFACTURER_PART_NUMBER: RC0603JR07100KL; VENDOR: Yageo
R14 R42-R45 = 1k-resistor; CASE: 0603 1608 metric; COMPOSITION: Thick Film; COPYRIGHT: Copyright C 2015 Accelerated Designs. All rights reserved; DATASHEET: httpwww.yageo.comdocumentsrecentPYuRC0603_51_RoHS_L_4.pdf; DESCRIPTION: RES 1.0K OHM 110W 5% 0603 SMD; DIGIKEYPARTNUMBER: 3111.0KGRTRND; HEIGHT: 0.022" 0.55mm; LEADSTYLE: Surface Mount SMD SMT; MANUFACTURER_PART_NUMBER: RC0603JR071KL; NEWARKPARTNUMBER: 14M7231; NUMBEROFTERMINATIONS: 2; PACKAGECASE: 0603 1608 Metric; PACKAGING: Tape &amp Reel TR; POWERWATTS: 0.1W 110W; QUANTITY_AVAILABLE: 0; RESISTANCEINOHMS: 1.00K; RESISTANCEOHMS: 1K; SIZEDIMENSION: 0.063" L x 0.031" W 1.60mm x 0.80mm; TEMPERATURECOEFFICIENT: 100ppm°C; TOLERANCE: 5%; VENDOR: Yageo; VOLTAGEWORKING: 50V
R17 R18 R22 R23 R27 R28 R70 R71 R75 R76 R80 R81 R97 R98 R102 R103 R107 R108 R124 R125 R129 R130 R134 R135 = 100-resistor; MANUFACTURER_PART_NUMBER: RC0603JR07100RL; VENDOR: Yageo
R41 = 1.5k-resistor; MANUFACTURER_PART_NUMBER: RC0603JR071K5L; VENDOR: Yageo
U1 U12 = tps54331; MANUFACTURER_PART_NUMBER: TPS54331DR; VENDOR: Texas Instruments
U4-U6 = DRV8313_BLDC_Driver; MANUFACTURER_PART_NUMBER: drv8313pwp; VENDOR: TEXAS INSTRUMENTS
U7 = stm32f103; MANUFACTURER_PART_NUMBER: STM32F103RCT6; VENDOR: STMicroelectronics
U8-U11 = atmel; MPN: ATMEGA8-16AU; OC_FARNELL: 9171371; OC_NEWARK: 73M8863
U14 = d-latch; MANUFACTURER_PART_NUMBER: SN74LVC1G373DCKR; VENDOR: Texas Instruments

## Nets
+3V1: C80.1 C81.2 C89.1 C90.2 J11.1 L3.2 L4.2 L6.2
+3V2: C87.1 C88.2 U13.19
+3V3: C46.2 C50.2 C56.1 C63.1 J7.3 J7.4 J7.5 J7.6 L1.P$2 R16.2 U7.1 U7.13 U7.19 U7.32 U7.48 U7.64
+3V4: C97.1 C98.2 C106.1 C107.2 J3.1 L9.2 L10.2 L12.2
+3V5: C104.1 C105.2 U15.19
+5V: C7.2 C32.2 C37.2 C43.2 C47.1 C62.1 C64.1 C66.2 C67.1 C69.2 C70.1 C72.2 C73.1 C75.2 J2.4 J7.1 J7.2 L2.P$2 R3.2 R10.2 R66.2 R93.2 R120.2 U2.16 U3.16 U4.16 U4.17 U4.22 U4.24 U4.26 U5.16 U5.17 U5.22 U5.24 U5.26 U6.16 U6.17 U6.22 U6.24 U6.26 U8.4 U8.6 U8.18 U9.4 U9.6 U9.18 U10.4 U10.6 U10.18 U11.4 U11.6 U11.18
A0: U4.27 U7.27
A1: U5.27 U7.22
A2: U6.27 U7.62
A_SENSE: R30.1 R33.2 R34.1 U8.24
A_SENSE2: R110.1 R113.2 R114.1 U9.24
A_SENSE3: R83.1 R86.2 R87.1 U10.24
A_SENSE4: R137.1 R140.2 R141.1 U11.24
AGND: C77.1 C83.2 C84.1 C85.2 C86.1 D15.A L5.1 U13.23 U13.26 U13.27 U13.29
AGND1: C94.1 C100.2 C101.1 C102.2 C103.1 D17.A L11.1 U15.23 U15.26 U15.27 U15.29
AHIN: R5.2 U8.27
AHIN2: R95.2 U9.27
AHIN3: R68.2 U10.27
AHIN4: R122.2 U11.27
ALIN: R1.1 R18.2 U8.30
ALIN2: R92.1 R98.2 U9.30
ALIN3: R65.1 R71.2 U10.30
ALIN4: R119.1 R125.2 U11.30
AOUT: C1.2 Q4.3 Q5.2 R33.1
AOUT2: C33.2 Q29.3 Q30.2 R113.1
AOUT3: C28.2 Q20.3 Q21.2 R86.1
AOUT4: C39.2 Q38.3 Q39.2 R140.1
AVCC: C83.1 C84.2 L4.1 U13.20
AVCC1: C100.1 C101.2 L10.1 U15.20
B0: U4.25 U7.26
B1: U5.25 U7.17
B2: U6.25 U7.15
B_SENSE: R29.1 R32.2 R35.1 U8.23
B_SENSE2: R109.1 R112.2 R115.1 U9.23
B_SENSE3: R82.1 R85.2 R88.1 U10.23
B_SENSE4: R136.1 R139.2 R142.1 U11.23
BATT_SCL: J7.20 SCL.TP
BATT_SDA: J7.19 SDA.TP
BHIN: R21.2 U8.31
BHIN2: R101.2 U9.31
BHIN3: R74.2 U10.31
BHIN4: R128.2 U11.31
BLIN: R19.1 R23.2 U8.28
BLIN2: R99.1 R103.2 U9.28
BLIN3: R72.1 R76.2 U10.28
BLIN4: R126.1 R130.2 U11.28
BOOT0: R12.2 U7.60
BOUT: C3.2 Q6.3 Q7.2 R32.1
BOUT2: C34.2 Q32.3 Q33.2 R112.1
BOUT3: C29.2 Q23.3 Q24.2 R85.1
BOUT4: C40.2 Q41.3 Q42.2 R139.1
C0: U4.23 U7.23
C1: U5.23 U7.16
C2: U6.23 U7.61
C_SENSE: R6.1 R31.2 R36.1 U8.22
C_SENSE2: R96.1 R111.2 R116.1 U9.22
C_SENSE3: R69.1 R84.2 R89.1 U10.22
C_SENSE4: R123.1 R138.2 R143.1 U11.22
CHIN: R26.2 U8.1
CHIN2: R106.2 U9.1
CHIN3: R79.2 U10.1
CHIN4: R133.2 U11.1
CLIN: R24.1 R28.2 U8.9
CLIN2: R104.1 R108.2 U9.9
CLIN3: R77.1 R81.2 U10.9
CLIN4: R131.1 R135.2 U11.9
COUT: C4.2 Q8.3 Q9.2 R31.1
COUT2: C35.2 Q35.3 Q36.2 R111.1
COUT3: C30.2 Q26.3 Q27.2 R84.1
COUT4: C41.2 Q44.3 Q45.2 R138.1
EN: R11.2 R15.1 U1.3 U12.3 U14.4
FAULT1: U4.18
FAULT2: U5.18
FAULT3: U6.18
GND: C2.2 C5.1 C6.2 C7.1 C8.1 C9.2 C10.2 C13.1 C14.1 C15.1 C16.1 C17.2 C18.2 C19.1 C20.1 C21.1 C22.1 C23.1 C24.1 C25.1 C31.1 C32.1 C36.1 C37.1 C42.1 C43.1 C44.2 C46.1 C47.2 C48.2 C50.1 C51.1 C52.1 C53.1 C55.2 C56.2 C57.2 C58.2 C59.2 C60.2 C61.2 C62.2 C63.2 C64.2 C65.2 C66.1 C67.2 C68.2 C69.1 C70.2 C71.2 C72.1 C73.2 C74.2 C75.1 D13.2 D14.2 GND.TP J1.- J2.1 J7.7 J7.8 J7.27 J7.28 J7.29 J7.30 JP1.2 JP3.2 JP4.2 JP5.2 Q1.2 Q2.2 Q3.2 Q5.3 Q7.3 Q9.3 Q19.2 Q21.3 Q22.2 Q24.3 Q25.2 Q27.3 Q28.2 Q30.3 Q31.2 Q33.3 Q34.2 Q36.3 Q37.2 Q39.3 Q40.2 Q42.3 Q43.2 Q45.3 R1.2 R2.1 R8.1 R12.1 R14.2 R19.2 R24.2 R34.2 R35.2 R36.2 R38.2 R41.2 R65.2 R72.2 R77.2 R87.2 R88.2 R89.2 R91.2 R92.2 R99.2 R104.2 R114.2 R115.2 R116.2 R118.2 R119.2 R126.2 R131.2 R141.2 R142.2 R143.2 R145.2 U1.7 U1.EP U2.6 U2.7 U2.8 U3.6 U3.7 U3.8 U4.6 U4.7 U4.10 U4.14 U4.20 U4.28 U4.29 U5.6 U5.7 U5.10 U5.14 U5.20 U5.28 U5.29 U6.6 U6.7 U6.10 U6.14 U6.20 U6.28 U6.29 U7.12 U7.18 U7.28 U7.31 U7.47 U7.63 U8.3 U8.5 U8.21 U9.3 U9.5 U9.21 U10.3 U10.5 U10.21 U11.3 U11.5 U11.21 U12.7 U12.EP U14.2 X1.2 X3.2 X4.2 X5.2 X6.2
GND1: C80.2 C81.1 C89.2 C90.1 J11.4 J11.P$5 J11.P$6 L5.2 L7.2 L8.2
GND2: C97.2 C98.1 C106.2 C107.1 J3.4 J3.P$5 J3.P$6 L11.2 L13.2 L14.2
GNDIO: C82.1 C87.2 C88.1 L8.1 U13.3 U13.4 U13.5 U13.8
GNDIO1: C99.1 C104.2 C105.1 L14.1 U15.3 U15.4 U15.5 U15.8
I2C_SCL: J11.3 R43.2 U13.13
I2C_SCL1: J3.3 R45.2 U15.13
I2C_SDA: J11.2 R42.2 U13.14
I2C_SDA1: J3.2 R44.2 U15.14
LIPO: C51.2 R40.2 R41.1 U7.21
MISO: J7.13 U3.3
MISO1: U3.1 U8.16
MISO2: U3.5 U9.16
MISO3: U3.2 U10.16
MISO4: U3.4 U11.16
MOSI: J7.12 U3.13
MOSI1: U3.12 U8.15
MOSI2: U3.14 U9.15
MOSI3: U3.15 U10.15
MOSI4: U3.11 U11.15
MOT0_1: J4.1 U4.5
MOT0_2: J4.2 U4.8
MOT0_3: J4.3 U4.9
MOT1_1: J5.1 U5.5
MOT1_2: J5.2 U5.8
MOT1_3: J5.3 U5.9
MOT2_1: J6.1 U6.5
MOT2_2: J6.2 U6.8
MOT2_3: J6.3 U6.9
N$1: C11.1 U4.2
N$2: C55.1 R7.2 U12.6
N$3: C53.2 R7.1
N$4: Q1.1 R5.1
N$5: Q4.1 R17.1
N$6: Q1.3 R4.2 R17.2
N$7: Q2.1 R21.1
N$8: C1.1 D1.C R4.1
N$9: Q5.1 R18.1
N$10: Q6.1 R22.1
N$11: C52.2 U12.4
N$12: C54.1 U12.1
N$13: C44.1 R9.2 U1.6
N$14: C18.1 R9.1
N$15: C14.2 U1.4
N$16: C26.1 U1.1
N$17: C26.2 D14.1 L2.P$1 U1.8
N$18: C54.2 D13.1 L1.P$1 U12.8
N$19: R8.2 R10.1 U1.5
N$20: R2.2 R16.1 U12.5
N$21: Q2.3 R20.2 R22.2
N$22: C3.1 D2.C R20.1
N$23: D16.C U13.7
N$24: Q7.1 R23.1
N$25: Q3.1 R26.1
N$26: C77.2 U13.24
N$27: D15.C U13.25
N$28: C85.1 C86.2 U13.21
N$29: D18.C U15.7
N$30: Q8.1 R27.1
N$31: Q3.3 R25.2 R27.2
N$32: C4.1 D3.C R25.1
N$33: Q9.1 R28.1
N$34: C5.2 U8.20
N$35: U8.7 X1.3
N$36: U8.8 X1.1
N$37: C11.2 U4.1
N$38: JP1.1 U8.19
N$39: C27.1 U5.2
N$40: C27.2 U5.1
N$41: C49.2 U5.3
N$42: C45.1 U6.2
N$43: C45.2 U6.1
N$44: R37.2 U8.12
N$45: C38.2 U6.3
N$46: U7.5 X6.3
N$47: C12.2 U4.3
N$48: U7.6 X6.1
N$49: C94.2 U15.24
N$50: D17.C U15.25
N$51: C102.1 C103.2 U15.21
N$61: Q19.1 R68.1
N$62: Q20.1 R70.1
N$63: Q19.3 R67.2 R70.2
N$64: C28.1 D7.C R67.1
N$65: Q21.1 R71.1
N$66: Q22.1 R74.1
N$67: Q23.1 R75.1
N$68: Q22.3 R73.2 R75.2
N$69: C29.1 D8.C R73.1
N$70: Q24.1 R76.1
N$71: Q25.1 R79.1
N$72: Q26.1 R80.1
N$73: Q25.3 R78.2 R80.2
N$74: C30.1 D9.C R78.1
N$75: Q27.1 R81.1
N$76: R90.2 U10.12
N$77: JP3.1 U10.19
N$78: C31.2 U10.20
N$79: U10.7 X3.3
N$80: U10.8 X3.1
N$82: Q28.1 R95.1
N$83: Q29.1 R97.1
N$84: Q28.3 R94.2 R97.2
N$85: C33.1 D4.C R94.1
N$86: Q30.1 R98.1
N$87: Q31.1 R101.1
N$88: Q32.1 R102.1
N$89: Q31.3 R100.2 R102.2
N$90: C34.1 D5.C R100.1
N$91: Q33.1 R103.1
N$92: Q34.1 R106.1
N$93: Q35.1 R107.1
N$94: Q34.3 R105.2 R107.2
N$95: C35.1 D6.C R105.1
N$96: Q36.1 R108.1
N$97: R117.2 U9.12
N$98: JP4.1 U9.19
N$99: C36.2 U9.20
N$100: U9.7 X4.3
N$101: U9.8 X4.1
N$103: Q37.1 R122.1
N$104: Q38.1 R124.1
N$105: Q37.3 R121.2 R124.2
N$106: C39.1 D10.C R121.1
N$107: Q39.1 R125.1
N$108: Q40.1 R128.1
N$109: Q41.1 R129.1
N$110: Q40.3 R127.2 R129.2
N$111: C40.1 D11.C R127.1
N$112: Q42.1 R130.1
N$113: Q43.1 R133.1
N$114: Q44.1 R134.1
N$115: Q43.3 R132.2 R134.2
N$116: C41.1 D12.C R132.1
N$117: Q45.1 R135.1
N$118: R144.2 U11.12
N$119: JP5.1 U11.19
N$120: C42.2 U11.20
N$121: U11.7 X5.3
N$122: U11.8 X5.1
NEUTRAL_SENSE: R6.2 R29.2 R30.2 U8.10
NEUTRAL_SENSE2: R96.2 R109.2 R110.2 U9.10
NEUTRAL_SENSE3: R69.2 R82.2 R83.2 U10.10
NEUTRAL_SENSE4: R123.2 R136.2 R137.2 U11.10
NT-RX: J2.2 U7.52
NT-TX: J2.3 U7.51
PWM: J7.23 R37.1 R38.1
PWM2: J7.24 R117.1 R118.1
PWM3: J7.25 R90.1 R91.1
PWM4: J7.26 R144.1 R145.1
PWR_EN: J7.18 R13.2 U14.3 U14.6
RESET: J7.17 U7.7
RST: J7.11 U2.13
RST1: C68.1 R3.1 U2.12 U8.29
RST2: C65.1 R93.1 U2.14 U9.29
RST3: C71.1 R66.1 U2.15 U10.29
RST4: C74.1 R120.1 U2.11 U11.29
RX: J7.22 U7.43
SCK: J7.14 U2.3
SCK1: U2.1 U8.17
SCK2: U2.5 U9.17
SCK3: U2.2 U10.17
SCK4: U2.4 U11.17
SCL: U7.29
SCL2: U7.58
SDA: U7.30
SDA2: U7.59
SEL0: J7.9 U2.10 U3.10
SEL1: J7.10 U2.9 U3.9
SWCLK: J7.16 U7.49
SWDIO: J7.15 U7.46
TX: J7.21 U7.42
V2FUSED: C17.1 F2.2 U1.2
V_LATCH: R11.1 R13.1 R14.1 R15.2 R39.2 U14.1 U14.5
VCCIO: C82.2 L3.1 R42.1 R43.1 U13.9 U13.10 U13.18
VCCIO1: C99.2 L9.1 R44.1 R45.1 U15.9 U15.10 U15.18
VDD: C6.1 C8.2 C9.1 C10.1 C12.1 C13.2 C15.2 C16.2 C19.2 C20.2 C21.2 C22.2 C23.2 C24.2 C25.2 C38.1 C48.1 C49.1 C57.1 C58.1 C59.1 C60.1 C61.1 D1.A D2.A D3.A D4.A D5.A D6.A D7.A D8.A D9.A D10.A D11.A D12.A F1.1 F2.1 J1.+ Q4.2 Q6.2 Q8.2 Q20.2 Q23.2 Q26.2 Q29.2 Q32.2 Q35.2 Q38.2 Q41.2 Q44.2 R39.1 R40.1 U4.4 U4.11 U5.4 U5.11 U6.4 U6.11
VDDLED: C76.2 C78.2 C79.2 C91.1 C92.2 D16.A L6.1
VDDLED1: C93.2 C95.2 C96.2 C108.1 C109.2 D18.A L12.1
VFUSED: C2.1 F1.2 U12.2
VSS: C76.1 C78.1 C79.1 C91.2 C92.1 L7.1 U13.6
VSS1: C93.1 C95.1 C96.1 C108.2 C109.1 L13.1 U15.6

## Tracks (layer width: path | path; a pad name or v marks a point on that pad's centre or on a via)
+3V1  (via drill 0.35)
  Top 0.254: v87.55,57.28 87.55,55.16 v87.5,55.12
  Bottom 0.254: 83.95,68.71 83.95,64.01 86.29,61.66 J11.1 86.35,60.57 86.82,60.57 87.72,59.67 L3.2 87.72,57.45 v87.55,57.28 | C90.2 89.15,54.14 L6.2 87.63,53.56 C89.1 87.5,54.5 v87.5,55.12 | C80.1 85.07,68.71 83.95,68.71 | 83.95,68.71 83.95,70.1 C81.2 84.23,70.32 L4.2
  other vias: 86.23,61.21 84.2,71.12 85.85,68.83 88.27,52.32
  pour Route2: 90.04,50.42 83.57,50.42 82.68,51.31 82.68,78.87 83.44,79.63 86.61,79.63 87.63,78.61 87.63,76.96 86.11,75.44 86.11,66.55 87.25,65.41 87.25,55.12 90.04,52.32
+3V2  (1 unrouted)
  Bottom 0.254: U13.19 88.4,66.03 86.72,66.03 C87.1 86.61,65.93 C88.2
+3V3  (via drill 0.35)
  Top 0.152: U7.1 51.17,21.45 | 51.17,21.45 50.67,21.95 C46.2 51.4,23.33 U7.64 | 51.17,21.45 51.18,21.46 52.2,21.46 52.71,20.96 53.34,20.96 | 54.15,10.54 U7.19 | U7.32 61.19,11.43 C50.2 62.74,10.48 v62.74,9.91 | v50.01,15.4 50.84,15.4 50.93,15.49 51.13,15.49 U7.13 52.2,15.4 53.34,16.55 53.34,20.96 | 53.34,20.96 58.61,20.96 59.05,21.4 v61.34,21.4 U7.48 | 54.15,10.54 51.94,10.54 50.1,12.38 50.1,13.31 v49.92,13.49 | 24.61,2.13 25.72,1.02 50.42,1.02 51.44,2.03 51.44,4.16 53.96,6.68 53.96,8.29 54.15,8.48 54.15,10.54
  Top 0.203: 24.61,2.13 23.77,2.13 23.67,2.24
  Top 0.254: 23.67,2.24 23.61,2.3 | R16.2 14.48,6.73 v13.84,6.1 | J7.6 J7.5 23.96,5.27 23.8,5.12 | J7.4 J7.3
  Top 0.508: v12.95,4.7 13.08,4.7 v13.46,5.08 v13.46,4.32 13.46,3.43 15.19,1.7 23.14,1.7 23.67,2.24 23.8,2.37 23.8,5.12 J7.4
  Bottom 0.152: v61.34,21.4 61.34,19.79 62.22,18.91 62.22,18.04 62.1,17.92 62.1,14.86 62.48,14.48 62.48,10.54 62.74,10.29 v62.74,9.91 | v49.92,13.49 50.01,13.58 v50.01,15.4
  Bottom 0.254: v13.84,6.1 10.92,6.1 L1.P$2
  Bottom 0.508: v12.95,4.7 12.25,4.7 C63.1 C56.1 10.16,5.01 L1.P$2
+3V4  (via drill 0.35)
  Top 0.254: v87.55,22.99 87.55,20.87 v87.5,20.83
  Bottom 0.254: 83.95,34.42 83.95,29.72 86.29,27.38 J3.1 86.35,26.28 86.82,26.28 87.72,25.38 L9.2 87.72,23.16 v87.55,22.99 | C107.2 89.15,19.85 L12.2 87.63,19.27 C106.1 87.5,20.21 v87.5,20.83 | C97.1 85.07,34.42 83.95,34.42 | 83.95,34.42 83.95,35.81 C98.2 84.23,36.03 L10.2
  other vias: 86.23,26.92 84.2,36.83 85.85,34.54 88.27,18.03
  pour Route2: 90.04,16.13 83.57,16.13 82.68,17.02 82.68,44.58 83.44,45.34 86.61,45.34 87.63,44.32 87.63,42.67 86.11,41.15 86.11,32.26 87.25,31.12 87.25,20.83 90.04,18.03
+3V5  (1 unrouted)
  Bottom 0.254: U15.19 88.4,31.74 86.72,31.74 C104.1 86.61,31.64 C105.2
+5V  (via drill 0.35)
  Top 0.152: v30.99,39.37 30.86,39.5 30.86,39.95 | U9.4 25.63,66.9 25.15,66.9 25.15,66.85 24.82,66.52 24.82,65.77 25.24,65.35 U9.6 24.5,65.35 C62.1 | 31.83,47.94 R3.2 | C37.2 36.36,63.44 36.8,63.88 | v36.8,63.35 36.8,63.88 | 36.8,63.88 C66.2 | v31.98,72.49 R93.2 | 48.51,33.58 v48.69,33.55
  Top 0.254: 27.03,39.95 U8.6 24.56,39.95 C67.1 | 27.03,39.95 30.86,39.95 30.99,39.95 | 30.99,39.95 32.19,39.95 33.02,39.12 34.23,39.12 U8.18 34.89,39.15 35.03,39.01 35.22,39.01 C7.2 36.07,38.16 C69.2 | U9.6 32.19,65.35 33.02,64.52 34.23,64.52 U9.18 34.83,64.55 C37.2 | 43.88,62.87 43.88,62.55 44.74,61.69 U10.18 45.78,61.72 46.74,61.72 | 43.88,62.87 C32.2 44.45,62.99 v44.58,62.87 | 46.74,61.72 46.99,61.72 47.82,60.89 U10.6 54.35,60.91 | U11.6 47.82,35.24 | 47.82,35.24 46.99,36.07 45.78,36.07 U11.18 45.65,36.13 44.96,36.13 44.85,36.24 v44.75,36.24 | 43.88,62.87 43.09,62.08 42.29,62.08 42.19,61.98 41.66,61.98 41.55,61.87 C72.2 | U3.16 v38.1,16.13 38.99,17.02 38.99,21.46 38.49,21.96 U2.16 | J2.4 66.19,22.58 v66.29,22.48 | R120.2 48.13,27.69 v47.91,27.91 | U8.4 26.57,41.55 27.03,41.1 27.03,39.95 | R66.2 48.21,52.55 v48.21,52.02 | C70.1 55.38,59.29 U10.4 52.83,59.28 52.63,59.08 47.85,59.08 46.74,60.2 46.74,61.72 | C73.1 54.48,33.78 U11.4 54.27,33.58 48.51,33.58 47.85,34.24 47.85,34.82 47.82,34.85 47.82,35.24 | C62.1 24.23,64.71 22.74,63.22 v22.45,63.22 | v32.64,48.01 R3.2 | v30.99,39.37 30.99,39.95 | R10.2 26.54,8.13 26.16,8.13 v25.4,7.37 | 22.22,4.83 22.22,5.21 | 22.22,5.21 22.22,5.23 J7.2 | J7.1 21.97,5.46 22.22,5.21
  Top 0.508: v22.1,3.81 22.1,4.7 22.22,4.83
  Bottom 0.152: C75.2 44.73,36.24 v44.75,36.24
  Bottom 0.254: U6.16 U6.17 42.54,18.54 44.07,20.07 | U4.22 67.63,18.16 67.09,18.71 67.09,18.89 v67.06,18.92 | U4.24 68.93,19.18 | 44.07,20.07 45.09,20.07 45.79,19.36 45.79,19.05 | 45.79,19.05 U6.22 | U5.16 U5.17 53.46,18.16 v54.04,18.73 55.88,18.73 | 57.53,19.68 56.46,19.68 56.1,19.33 56.1,18.96 55.88,18.73 | U5.24 58.01,19.2 57.53,19.68 | 57.53,19.68 58.93,19.68 59.31,19.3 U5.26 | 45.97,21.97 44.07,20.07 | 47.12,21.97 48.39,21.97 U6.26 | 47.12,21.97 47.09,21.95 U6.24 | U5.22 56.71,18.22 56.2,18.73 56.07,18.73 | 55.88,18.73 56.07,18.73 | U4.16 U4.17 64.38,18.54 v64.58,18.73 64.77,18.92 v67.06,18.92 | v67.06,18.92 67.31,19.18 68.93,19.18 | 68.93,19.18 69.47,19.18 69.5,19.15 69.79,19.15 70.23,18.71 U4.26 | C43.2 44.97,36.24 v44.75,36.24 44.75,34.89 44.73,34.88 | 47.12,21.97 45.97,21.97 | 45.97,21.97 46.38,22.37 v46.38,22.52 | 45.79,19.05 45.74,19 v45.74,18.59 | v55.81,18.99 56.07,18.73 | L2.P$2 22.73,4.57 24.76,4.57 25.4,5.21 v25.4,7.37
  Bottom 0.508: 20.27,5.28 19.61,4.62 | 20.29,5.3 20.27,5.28 | 20.27,5.28 20.27,4.47 | C64.1 21.34,3.05 v22.1,3.81
  Bottom 0.635: C47.1 17.92,4.62 19.61,4.62 19.61,4.18 C64.1
  other vias: 43.58,19.48
  pour Route2 (isolate 0.254): -0.25,89.15 80.42,89.15 80.42,0 -0.25,0
A0  (via drill 0.35)
  Top 0.152: U7.27 58.28,12.11 58.28,13.12 58.98,13.82 60.4,13.82 60.73,13.49 60.73,13.31 61.72,12.32 67.69,12.32 v71.12,15.75
  Bottom 0.152: v71.12,15.75 70.88,15.98 U4.27
A1  (via drill 0.35)
  Top 0.152: v59.96,18.44 55.65,14.13 U7.22
  Bottom 0.152: U5.27 v59.96,18.44
A2  (via drill 0.35)
  Top 0.152: v49.02,21.34 49.02,23.88 50.09,24.94 53.49,24.94 54.15,24.28 U7.62
  Bottom 0.152: U6.27 49.04,21.32 v49.02,21.34
A_SENSE  (via drill 0.35)
  Top 0.254: R30.1 R33.2 29.6,29.59 32.02,29.59 R34.1 32.78,31.46 v32.82,31.5 | U8.24 34.22,43.99 34.01,43.79 32.95,43.79 v32.75,43.59
  Bottom 0.254: v32.82,31.5 32.82,38.4 32.39,38.83 32.39,43.12 32.75,43.49 v32.75,43.59
A_SENSE2  (via drill 0.35)
  Top 0.254: R110.1 R113.2 29.6,54.99 32.02,54.99 R114.1 32.78,56.86 v32.82,56.9 | U9.24 34.22,69.39 34.05,69.22 v33.34,69.22
  Bottom 0.254: v32.82,56.9 32.82,63.8 32.26,64.36 32.11,64.36 31.72,64.74 31.72,65.54 31.98,65.79 31.98,66.29 31.7,66.57 31.7,68.53 32.39,69.22 v33.34,69.22
A_SENSE3  (via drill 0.35)
  Top 0.254: R83.1 R86.2 50.41,71.25 47.99,71.25 R87.1 47.23,69.38 v47.19,69.34 | v46.57,56.77 45.87,56.77 U10.24
  Bottom 0.254: v46.57,56.77 46.65,56.94 46.65,56.97 47.14,57.46 47.14,57.62 47.6,58.08 47.6,58.99 47.19,59.39 v47.19,69.34
A_SENSE4  (via drill 0.35)
  Top 0.254: R137.1 R140.2 50.41,45.59 47.99,45.59 R141.1 47.23,43.73 v47.19,43.69 | v46.74,31.19 45.79,31.19 U11.24
  Bottom 0.254: v47.19,43.69 47.19,36.93 47.93,36.2 47.93,33.36 48,33.28 48,31.9 47.3,31.19 v46.74,31.19
AGND  (via drill 0.35)  (3 unrouted)
  Bottom 0.254: 90.93,65.02 U13.26 92.33,66.42 | 90.93,65.02 90.17,64.26 89.92,64.26 | 89.92,64.26 U13.29 | U13.23 90.04,66.25 90.04,64.39 89.92,64.26 | 92.71,66.04 92.66,66.04 U13.27 91.64,65.02 90.93,65.02
  other vias: 93.47,66.55 95.12,65.91 95.25,67.06 95.12,68.33 96.14,69.22 95.38,70.48 95.63,72.14 95.25,73.66 93.98,73.28 93.85,74.93 92.58,73.79 91.57,74.8 90.8,72.9 90.17,74.3 89.41,73.03 88.39,73.41 90.17,67.44 89.28,68.96 96.65,70.99 89.28,64.9 90.42,63.75 89.92,64.39 88.9,63.37 90.8,65.02
  pour Bottom (isolate 0.381): 86.87,67.31 86.87,75.56 89.03,76.96 94.74,77.09 97.54,75.31 97.66,65.91 96.39,64.64 91.06,64.77
  pour Top (isolate 0.381): 89.92,64.9 96.39,64.77 97.54,65.91 97.54,75.69 96.27,76.96 89.53,76.96 86.87,75.44 86.87,67.31
  pour Route2 (isolate 0.381): 86.87,75.44 86.87,67.44 88.39,65.91 88.39,64.39 87.88,63.88 89.41,62.36 89.53,62.36 91.82,64.64 96.39,64.64 97.54,65.79 97.54,75.56 96.14,76.96 89.03,76.96 88.39,76.96
AGND1  (via drill 0.35)  (3 unrouted)
  Bottom 0.254: 90.93,30.73 U15.26 92.33,32.13 | 90.93,30.73 90.17,29.97 89.92,29.97 | 89.92,29.97 U15.29 | U15.23 90.04,31.96 90.04,30.1 89.92,29.97 | 92.71,31.75 92.66,31.75 U15.27 91.64,30.73 90.93,30.73
  other vias: 93.47,32.26 95.12,31.62 95.25,32.77 95.12,34.04 96.14,34.92 95.38,36.2 95.63,37.85 95.25,39.37 93.98,38.99 93.85,40.64 92.58,39.5 91.57,40.51 90.8,38.61 90.17,40.01 89.41,38.73 88.39,39.12 90.17,33.15 89.28,34.67 96.65,36.7 89.28,30.61 90.42,29.46 89.92,30.1 88.9,29.08 90.8,30.73
  pour Bottom (isolate 0.381): 86.87,33.02 86.87,41.27 89.03,42.67 94.74,42.8 97.54,41.02 97.66,31.62 96.39,30.35 91.06,30.48
  pour Top (isolate 0.381): 89.92,30.61 96.39,30.48 97.54,31.62 97.54,41.4 96.27,42.67 89.53,42.67 86.87,41.15 86.87,33.02
  pour Route2 (isolate 0.381): 86.87,41.15 86.87,33.15 88.39,31.62 88.39,30.1 87.88,29.59 89.41,28.07 89.53,28.07 91.82,30.35 96.39,30.35 97.54,31.5 97.54,41.27 96.14,42.67 89.03,42.67 88.39,42.67
AHIN
  Top 0.152: 29.06,48.26 28.99,48.26
  Top 0.254: U8.27 31.11,45.5 31.11,47.36 30.84,47.64 30.84,48.58 30.67,48.74 29.47,48.74 28.99,48.26 25.45,48.26 23.11,45.92 21.67,45.92 20.93,45.19 20.93,43.43 20.43,42.93 R5.2
AHIN2
  Top 0.254: R95.2 21.08,68.33 21.59,68.83 21.59,70.36 22.35,71.12 24,71.12 27.56,74.68 30.73,74.68 30.81,74.6 30.82,74.6 31.17,74.25 U9.27
AHIN3
  Top 0.254: R68.2 58.93,57.91 58.42,57.4 58.42,55.88 57.66,55.12 56.01,55.12 52.95,52.06 52.86,51.97 52.83,51.94 49.24,51.94 48.97,52.21 48.97,53.13 48.39,53.71 48.39,54.43 48.84,54.88 U10.27
AHIN4
  Top 0.254: U11.27 48.84,29.12 48.69,28.97 48.69,26.88 49.08,26.49 53.67,26.49 56.64,29.46 58.22,29.46 58.58,29.82 58.58,31.49 59.34,32.26 R122.2
ALIN
  Top 0.254: U8.30 28.77,46.92 28.32,47.37 25.71,47.37 22.73,44.39 22.73,42.7 21.57,41.54 16.27,41.54 15.19,42.62 15.19,43.34 R1.1 R18.2
ALIN2
  Top 0.152: 23.24,69.6 23.16,69.52 23.16,68.03 23.03,67.9 22.17,67.9 21.84,68.22 21.48,68.22 20.82,67.56 19,67.56
  Top 0.254: U9.30 28.77,72.32 28.32,72.77 26.42,72.77 23.24,69.6 | 19,67.56 16.37,67.56 R92.1 R98.2
ALIN3
  Top 0.254: U10.30 51.24,53.92 51.69,53.47 53.59,53.47 56.77,56.64 56.77,58.2 57.25,58.67 63.64,58.67 R65.1 R71.2
ALIN4
  Top 0.254: U11.30 51.24,28.26 51.69,27.81 53.59,27.81 56.77,30.99 56.77,32.54 57.6,33.38 64.21,33.38 64.67,32.92 64.67,31.99 R119.1 R125.2
AOUT  (via drill 0.35)
  Top 0.152: 34.29,45.77 34.29,44.58 34.17,44.46 33.54,44.46 33.22,44.14 32.51,44.14 31.38,43.01 v31.29,43.01
  Top 0.254: C1.2 12.95,48.77 v13.59,49.4 13.61,49.43 17.17,49.43 17.78,50.04 32,50.04 34.29,47.75 34.29,45.77 | R33.1 30.61,30.37 v30.61,31.24
  Bottom 0.152: v31.29,43.01 31.2,42.91 31.2,40.74
  Bottom 0.203: 31.2,40.74 31.2,40.4 31.67,39.92 31.67,38.85 31.42,38.59 31.42,38.05 31.88,37.59
  Bottom 0.254: v30.61,31.24 30.61,33.35 31.88,34.62 31.88,37.59 | v13.59,49.4 13.59,45.38 Q5.2
  other vias: 7.87,44.2 6.86,44.2 5.84,44.2 1.52,45.97 1.52,44.96 1.52,43.94 1.52,42.93 3.56,42.93 3.56,43.94 3.56,44.96 3.56,45.97 5.84,45.97 6.86,45.97 7.87,45.97
  pour Bottom (no thermals): 16.51,43.43 17.27,44.2 19.56,44.2 21.84,46.48 21.84,49.28 11.18,49.28 10.41,48.51 15.49,43.43
  pour Bottom (no thermals): 11.43,46.23 4.32,46.23 3.81,46.74 0.76,46.74 0.76,42.42 4.57,42.42 5.33,43.94 8.38,43.94 10.41,42.16 10.72,42.16 11.43,42.67 11.43,44.2 11.68,44.45 11.68,45.97
  pour Top (no thermals): 1.02,46.48 4.06,46.48 4.32,46.23 8.38,46.23 8.38,43.94 5.08,43.94 3.81,42.67 1.02,42.67
AOUT2  (via drill 0.35)
  Top 0.254: C33.2 12.95,74.37 v12.19,75.13 12.65,74.68 15.94,74.68 16.09,74.83 24.33,74.83 24.59,75.08 32.51,75.08 34.29,73.3 v34.29,71.58 | R113.1 30.61,55.77 v30.61,56.64
  Bottom 0.152: Q30.2 12.19,72.18 12.19,74.42
  Bottom 0.254: 12.19,74.42 v12.19,75.13 | v30.61,56.64 30.61,58.75 31.88,60.02 31.88,63.02 30.76,64.14 30.76,68.99 32.32,70.55 33.26,70.55 v34.29,71.58
  other vias: 7.87,69.6 6.86,69.6 5.84,69.6 1.52,71.37 1.52,70.36 1.52,69.34 1.52,68.33 3.56,68.33 3.56,69.34 3.56,70.36 3.56,71.37 5.84,71.37 6.86,71.37 7.87,71.37
  pour Bottom (no thermals): 16.51,68.83 17.27,69.6 19.56,69.6 21.84,71.88 21.84,74.68 11.18,74.68 10.41,73.91 15.49,68.83
  pour Bottom (no thermals): 11.43,71.63 4.32,71.63 3.81,72.14 0.76,72.14 0.76,67.82 4.57,67.82 5.33,69.34 8.38,69.34 10.41,67.56 10.72,67.56 11.43,68.07 11.43,69.6 11.68,69.85 11.68,71.37
  pour Top (no thermals): 1.02,71.88 4.06,71.88 4.32,71.63 8.38,71.63 8.38,69.34 5.08,69.34 3.81,68.07 1.02,68.07
AOUT3  (via drill 0.35)
  Top 0.254: R86.1 49.4,70.47 v49.4,69.6 | C28.2 67.06,51.36 v66.8,51.11 63.96,51.11 63.65,51.41 47.85,51.41 47.12,52.15 v47.12,53.98
  Bottom 0.152: Q21.2 66.27,55.61 67.82,54.06 67.82,51.82
  Bottom 0.254: v49.4,69.6 49.4,67.49 48.13,66.22 48.13,63.01 48.52,62.62 48.74,62.4 48.74,61.59 48.74,57.51 48.51,57.28 48.51,56.52 47.12,55.12 v47.12,53.98 | v66.8,51.11 66.8,55.08 66.27,55.61
  other vias: 72.14,56.64 73.15,56.64 74.17,56.64 78.49,54.86 78.49,55.88 78.49,56.9 78.49,57.91 76.45,57.91 76.45,56.9 76.45,55.88 76.45,54.86 74.17,54.86 73.15,54.86 72.14,54.86
  pour Bottom (no thermals): 63.5,57.4 62.74,56.64 60.45,56.64 58.17,54.36 58.17,51.56 68.83,51.56 69.6,52.32 64.52,57.4
  pour Bottom (no thermals): 68.58,54.61 75.69,54.61 76.2,54.1 79.25,54.1 79.25,58.42 75.44,58.42 74.68,56.9 71.63,56.9 69.6,58.67 69.29,58.67 68.58,58.17 68.58,56.64 68.33,56.39 68.33,54.86
  pour Top (no thermals): 78.99,54.36 75.95,54.36 75.69,54.61 71.63,54.61 71.63,56.9 74.93,56.9 76.2,58.17 78.99,58.17
AOUT4  (via drill 0.35)
  Top 0.254: C39.2 67.06,26.21 v66.52,25.68 57.88,25.68 57.55,26.01 47.81,26.01 47.17,26.66 47.17,27.19 47.12,27.25 v47.12,28.32 | R140.1 49.4,44.82 v49.4,43.94
  Bottom 0.254: v49.4,43.94 49.4,41.84 48.13,40.57 48.13,37.36 49.37,36.12 49.37,31.71 47.12,29.46 v47.12,28.32 | v66.52,25.68 66.52,29.7 Q39.2
  other vias: 72.14,30.99 73.15,30.99 74.17,30.99 78.49,29.21 78.49,30.23 78.49,31.24 78.49,32.26 76.45,32.26 76.45,31.24 76.45,30.23 76.45,29.21 74.17,29.21 73.15,29.21 72.14,29.21
  pour Bottom (no thermals): 63.5,31.75 62.74,30.99 60.45,30.99 58.17,28.7 58.17,25.91 68.83,25.91 69.6,26.67 64.52,31.75
  pour Bottom (no thermals): 68.58,28.96 75.69,28.96 76.2,28.45 79.25,28.45 79.25,32.77 75.44,32.77 74.68,31.24 71.63,31.24 69.6,33.02 69.29,33.02 68.58,32.51 68.58,30.99 68.33,30.73 68.33,29.21
  pour Top (no thermals): 78.99,28.7 75.95,28.7 75.69,28.96 71.63,28.96 71.63,31.24 74.93,31.24 76.2,32.51 78.99,32.51
AVCC  (1 unrouted)
  Bottom 0.254: C83.1 85.36,71.52 L4.1 86.77,70.1 C84.2 87.25,67.89 U13.20
AVCC1  (1 unrouted)
  Bottom 0.254: C100.1 85.36,37.23 L10.1 86.77,35.81 C101.2 87.25,33.61 U15.20
B0  (via drill 0.35)
  Top 0.152: U7.26 57.65,12.92 58.85,14.12 60.53,14.12 61.03,13.62 61.03,13.44 61.75,12.72 67.33,12.72 69.54,14.93 v69.54,18.54
  Bottom 0.152: v69.54,18.54 69.54,17.26 U4.25
B1  (via drill 0.35)
  Top 0.152: U7.17 53.15,13.01 v58.67,18.54
  Bottom 0.152: U5.25 58.66,18.53 v58.67,18.54
B2  (via drill 0.35)
  Top 0.152: v47.75,21.34 47.24,21.34 46.36,20.45 46.36,17.78 48.6,15.54 48.6,15.14 49.33,14.4 U7.15
  Bottom 0.152: U6.25 47.74,21.32 v47.75,21.34
B_SENSE  (via drill 0.35)
  Top 0.254: R29.1 R35.1 29.6,27.81 32.02,27.81 R32.2 33.58,29.38 v33.58,29.52 | U8.23 v33.53,43.15
  Bottom 0.254: v33.58,29.52 33.58,32.41 33.27,32.71 33.27,38.52 32.79,39 32.79,42.54 33.02,42.77 33.02,42.93 33.31,42.93 v33.53,43.15
B_SENSE2  (via drill 0.35)
  Top 0.254: R109.1 R115.1 29.6,53.21 32.02,53.21 R112.2 33.58,54.77 v33.58,54.91 | v32.77,68.58 32.8,68.55 U9.23
  Bottom 0.254: v33.58,54.91 33.58,57.81 33.27,58.12 33.27,63.92 32.42,64.77 32.36,64.77 32.16,64.97 32.16,65.39 32.38,65.62 32.38,66.46 32.16,66.69 32.16,67.97 v32.77,68.58
B_SENSE3  (via drill 0.35)
  Top 0.254: R82.1 R88.1 50.41,73.03 47.99,73.03 R85.2 46.43,71.46 v46.43,71.32 | v46.53,57.71 45.76,57.71 U10.23
  Bottom 0.254: v46.43,71.32 46.43,68.43 46.74,68.12 46.74,59.27 47.19,58.82 47.19,58.25 46.73,57.79 v46.53,57.71
B_SENSE4  (via drill 0.35)
  Top 0.254: R136.1 R142.1 50.41,47.37 47.99,47.37 R139.2 46.43,45.81 v46.43,45.67 | v47.24,32 47.21,32.04 U11.23
  Bottom 0.254: v46.43,45.67 46.43,42.77 46.74,42.47 46.74,36.73 47.52,35.94 47.52,33.19 47.6,33.11 47.6,32.36 v47.24,32
BATT_SCL  (via drill 0.35)